# Altium PCB FCM_Integrated.PcbDoc (part 1 of 3)
Units mil, origin at the board's own origin, x right, y up, seen from the top; angles counter-clockwise.
Board outline 5445 x 4366 mil, 4 copper layers (Top Layer, Power, Ground, Bottom Layer), stack 23.756 mil thick; 160 components, 87 nets, 607 pads, 169 vias.
Unrouted connection lines stored in the file: 134.
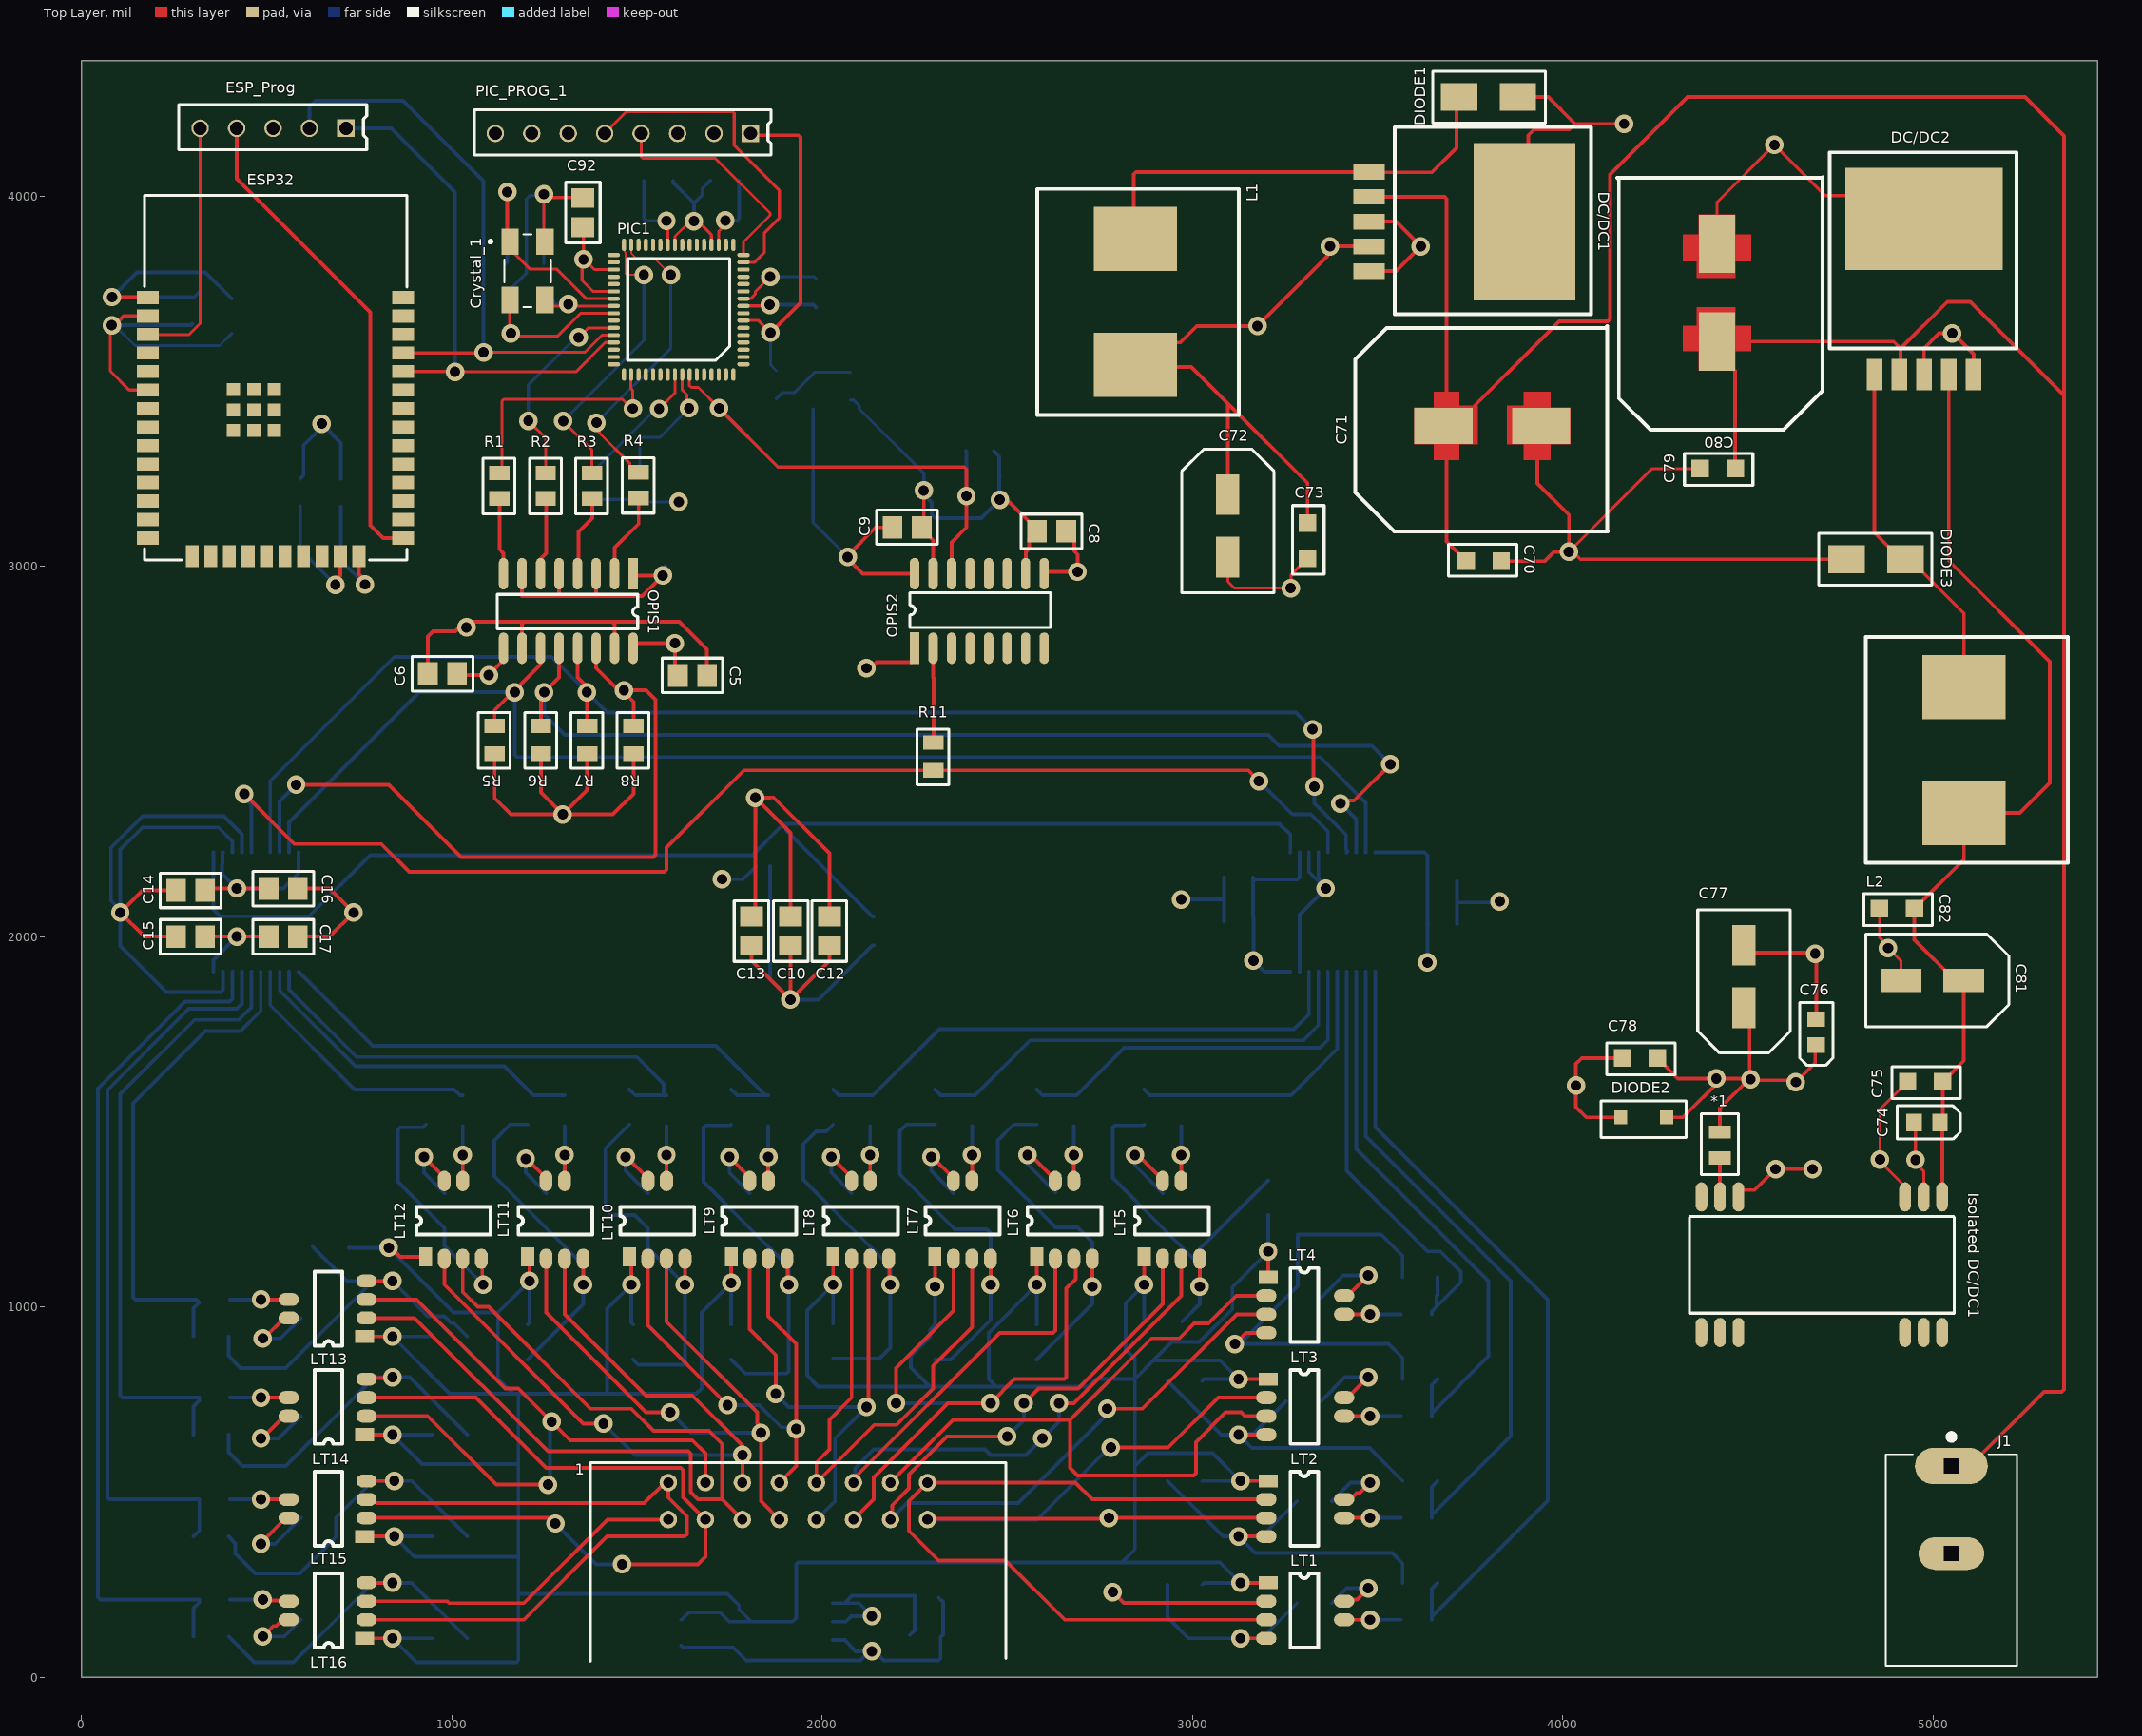
[diagram p0: Top Layer view]
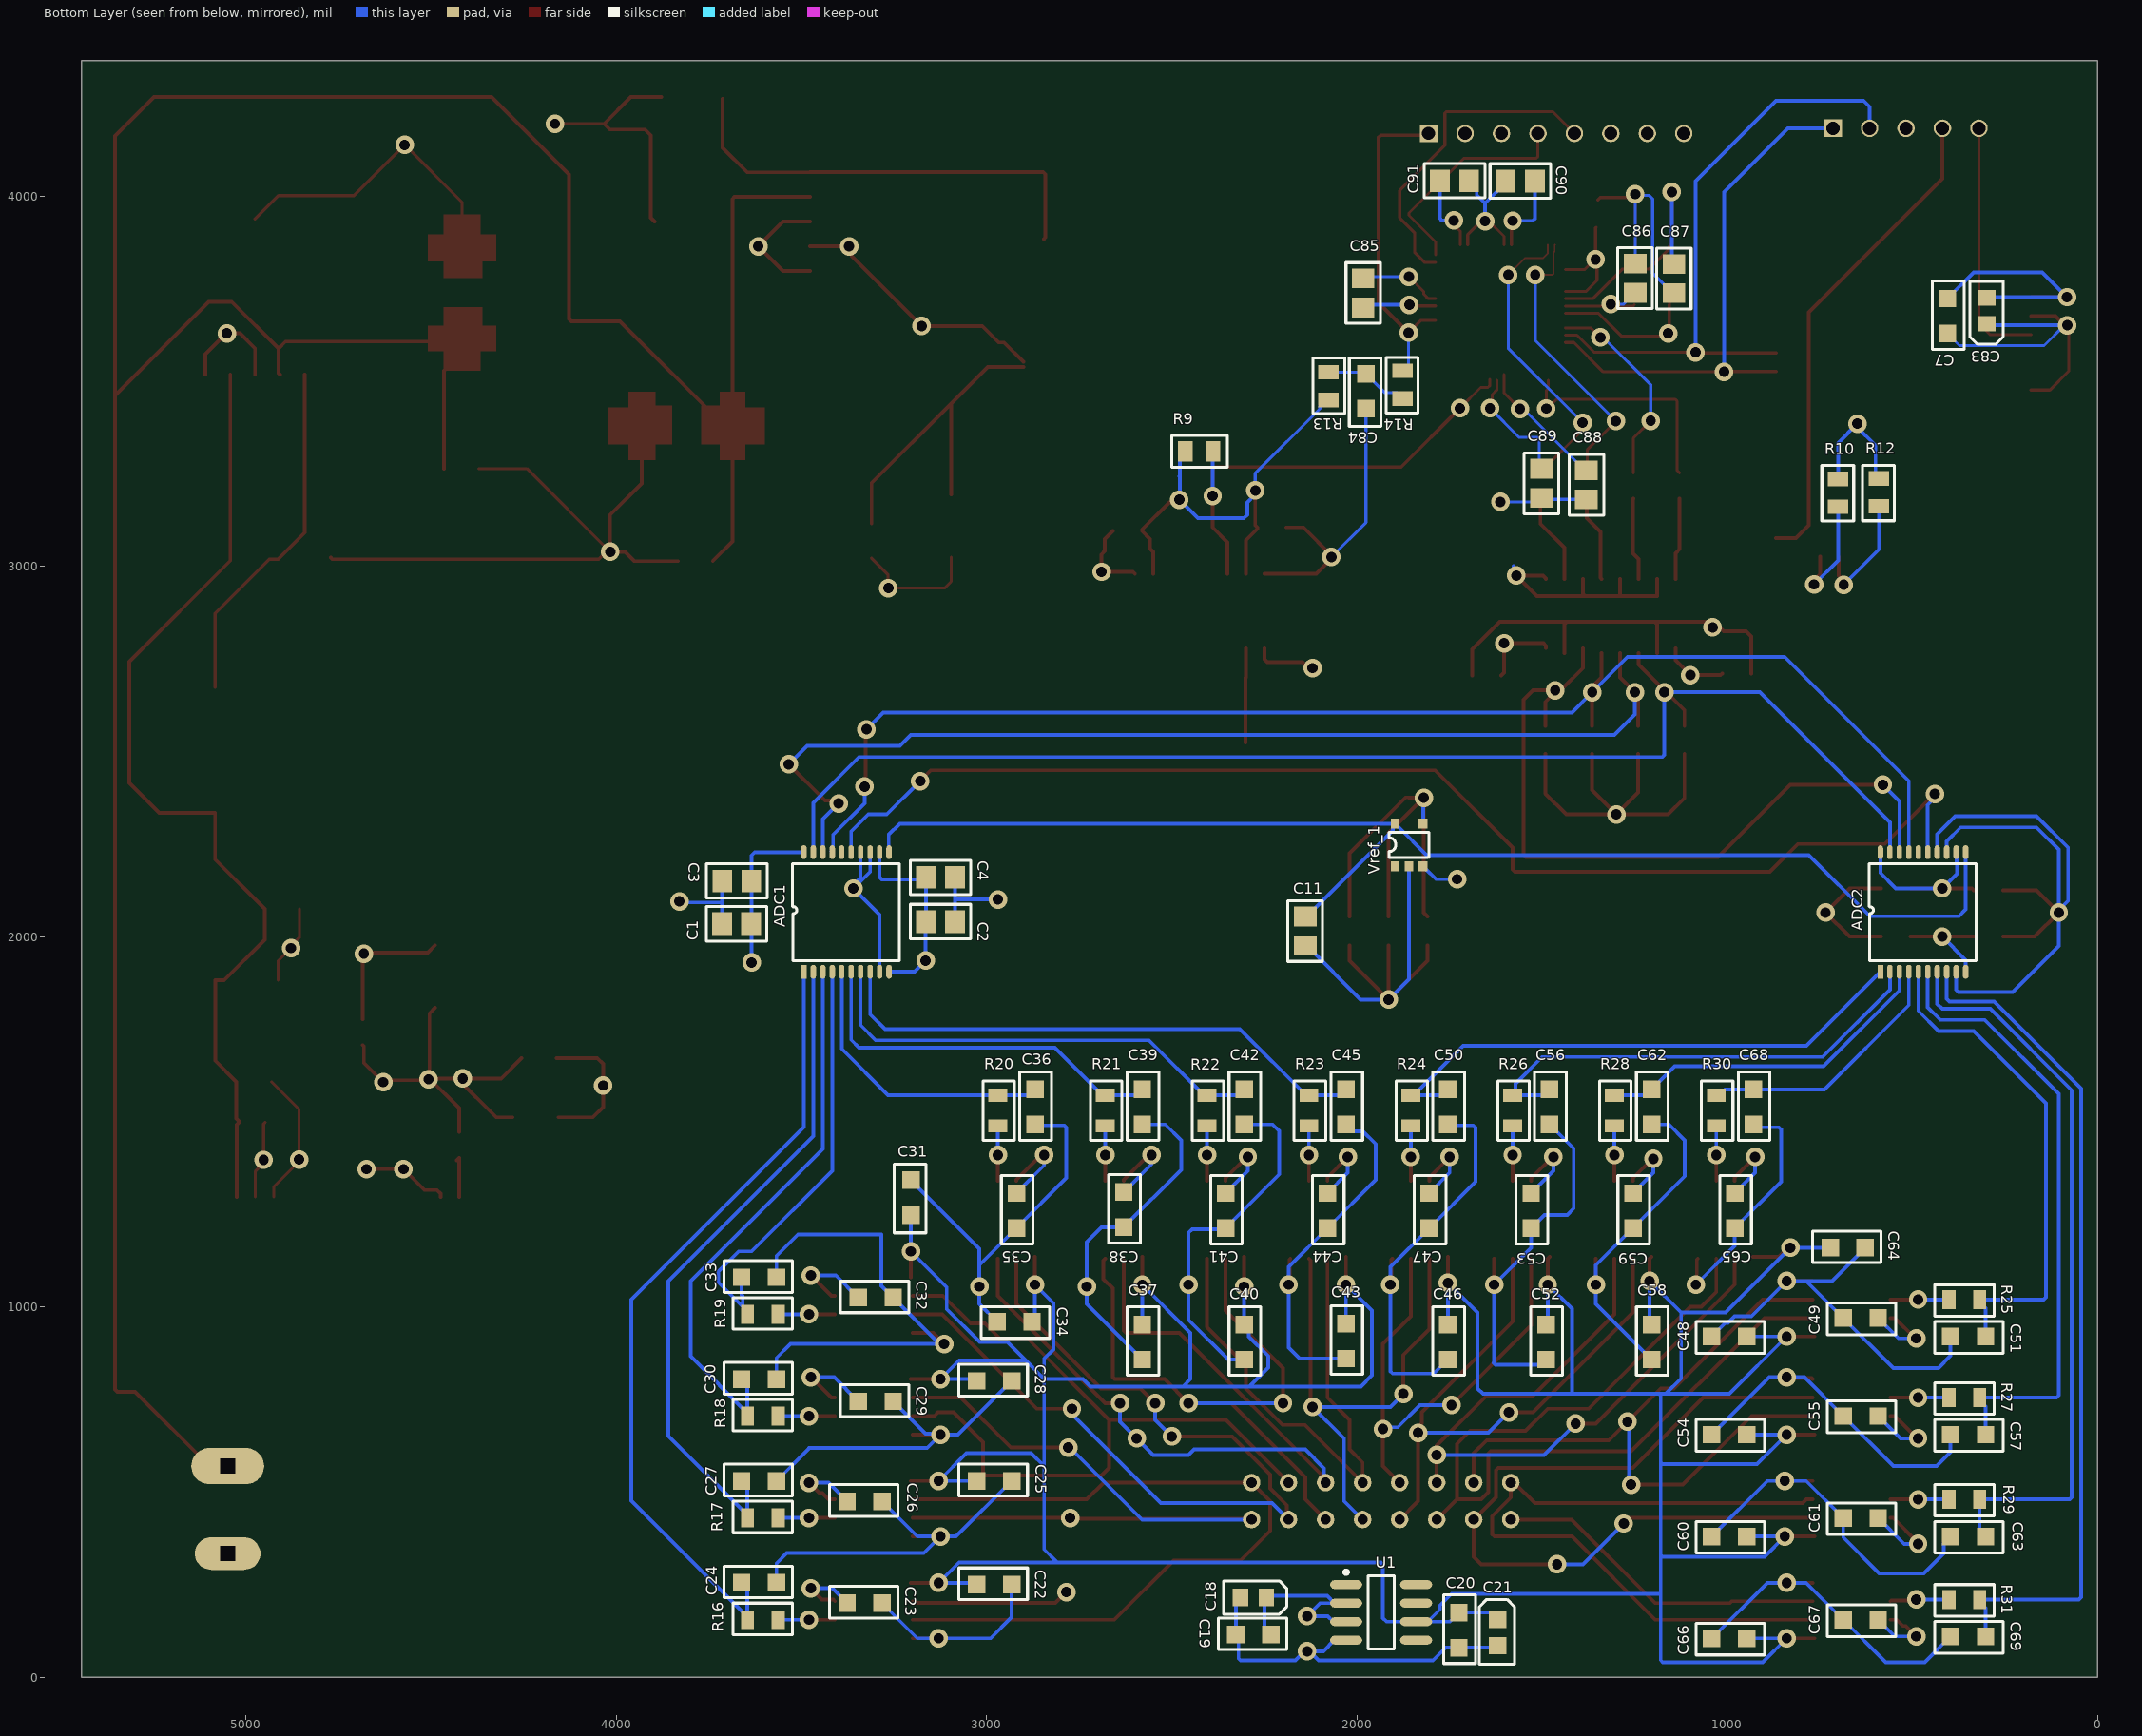
[diagram p1: Bottom Layer view, seen from below]
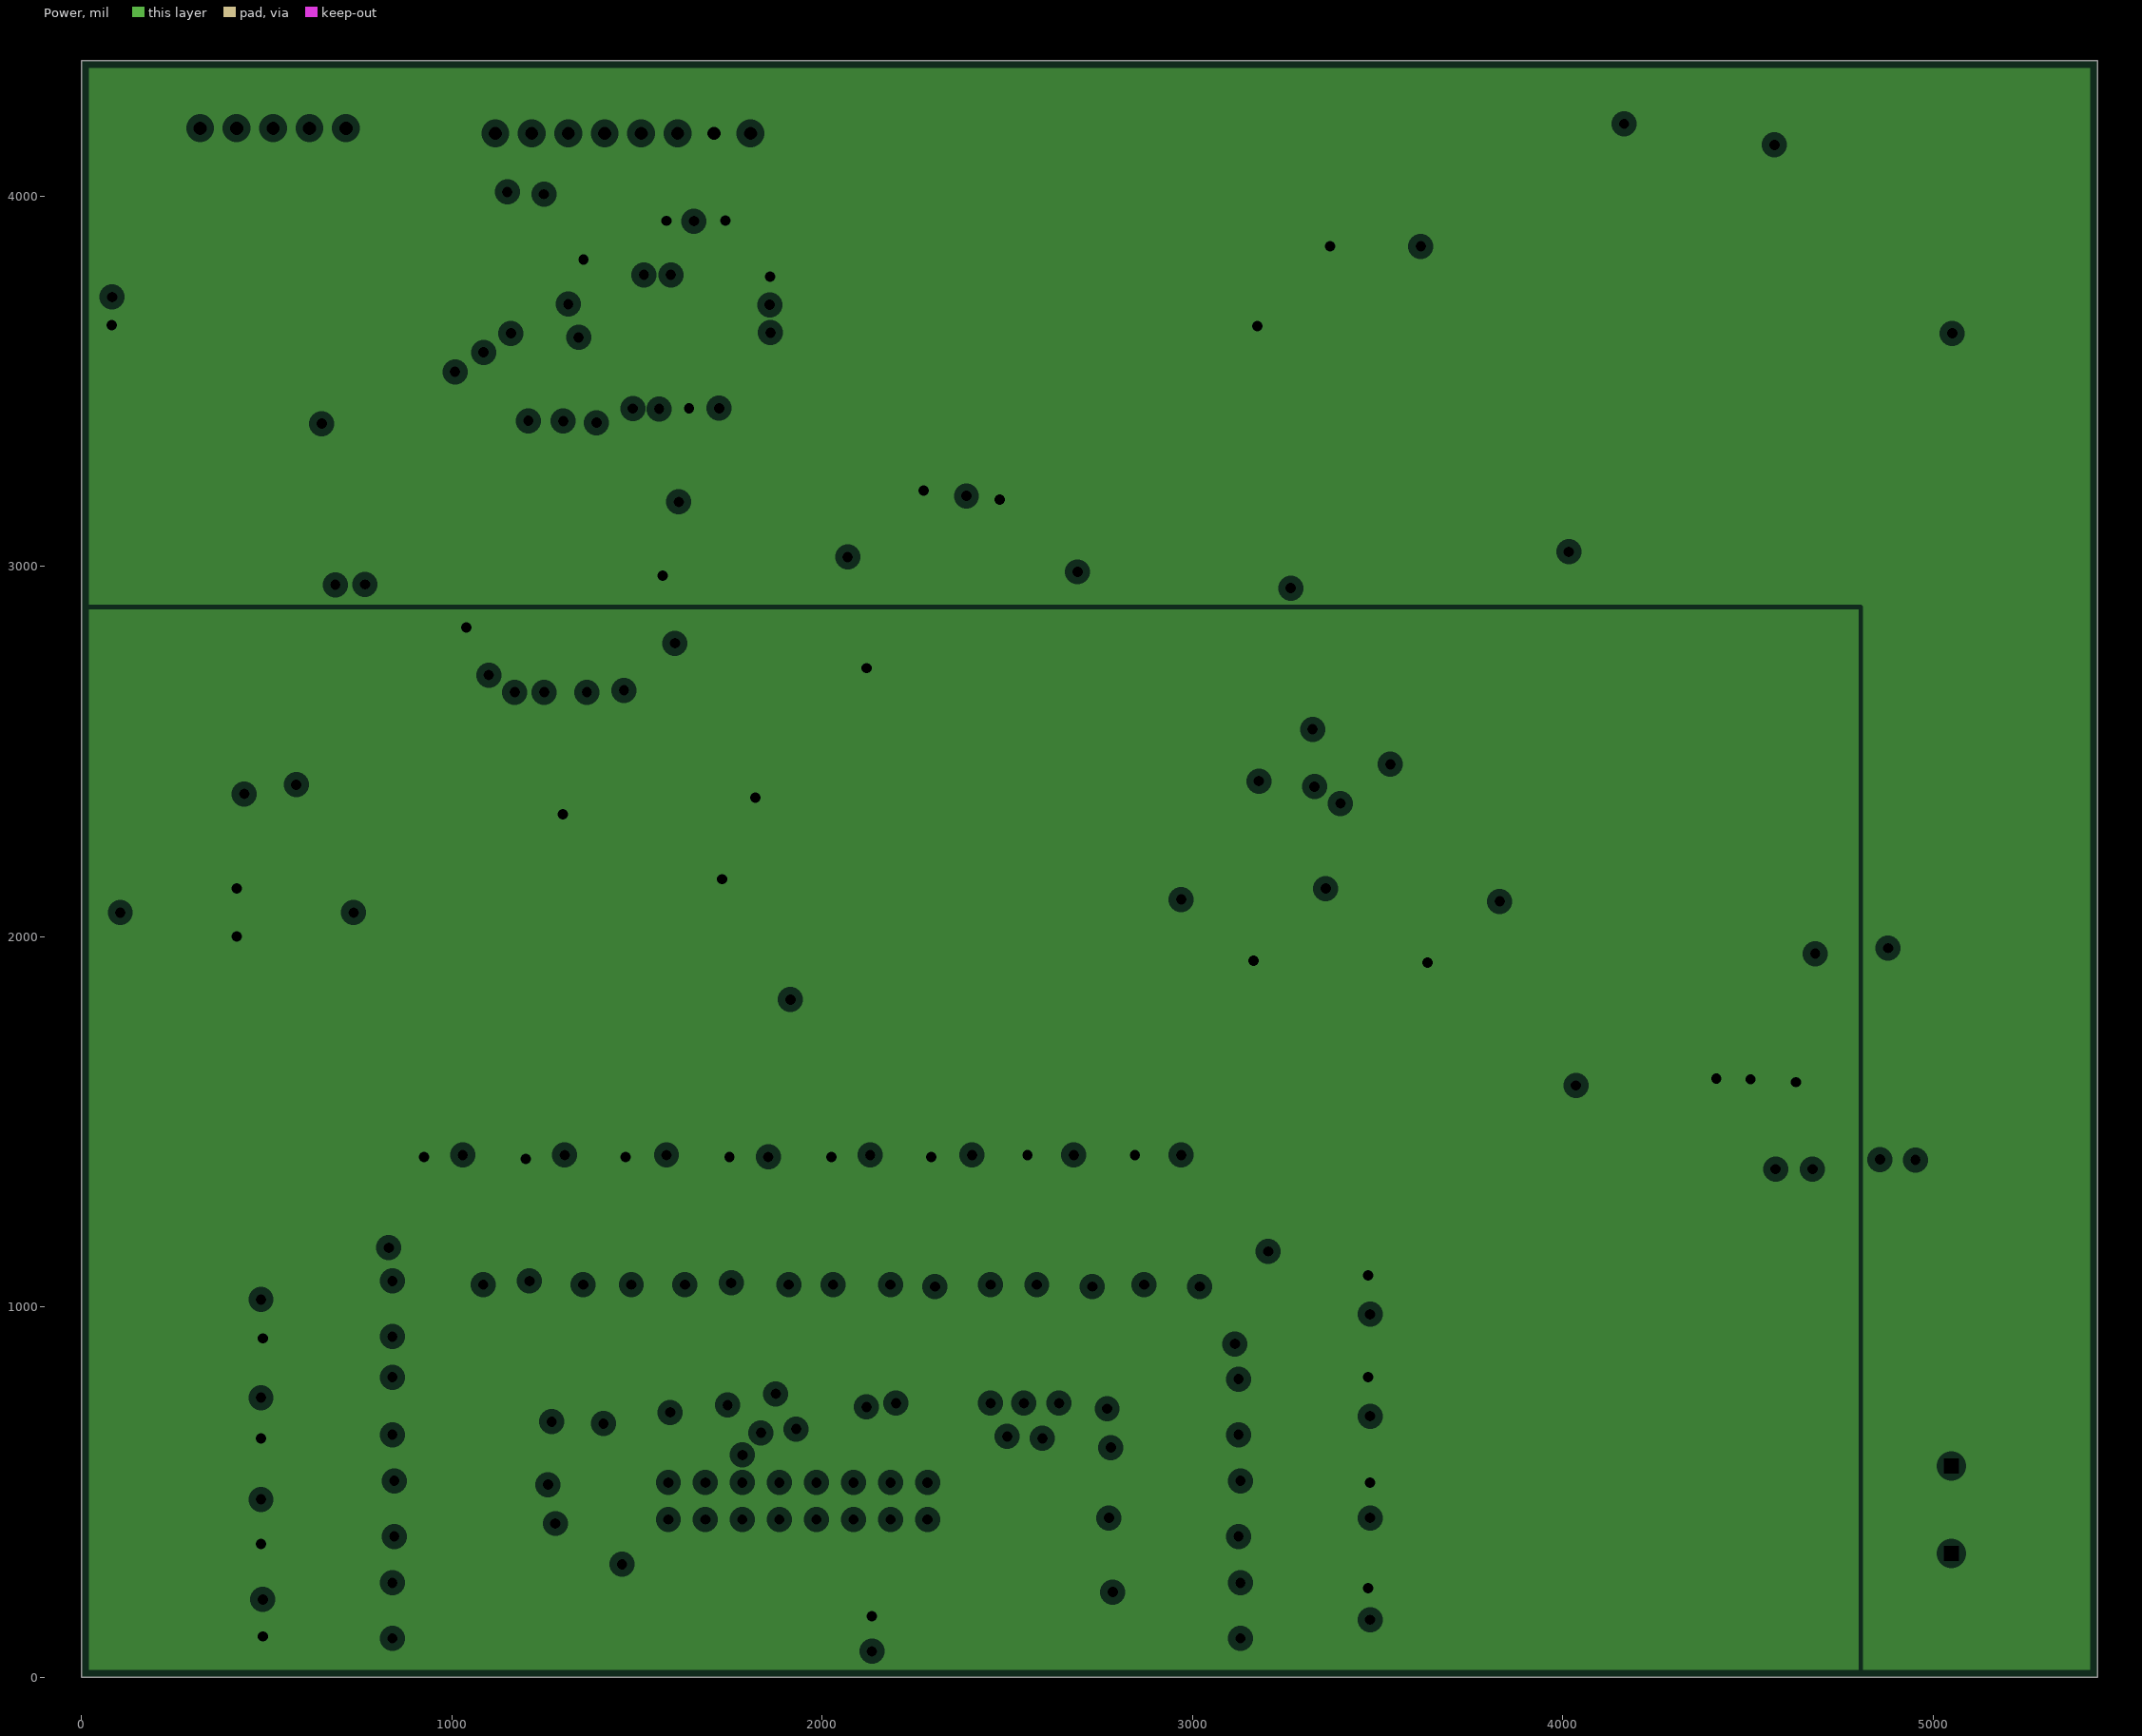
[diagram p2: Power, clearances drawn from the general rule]
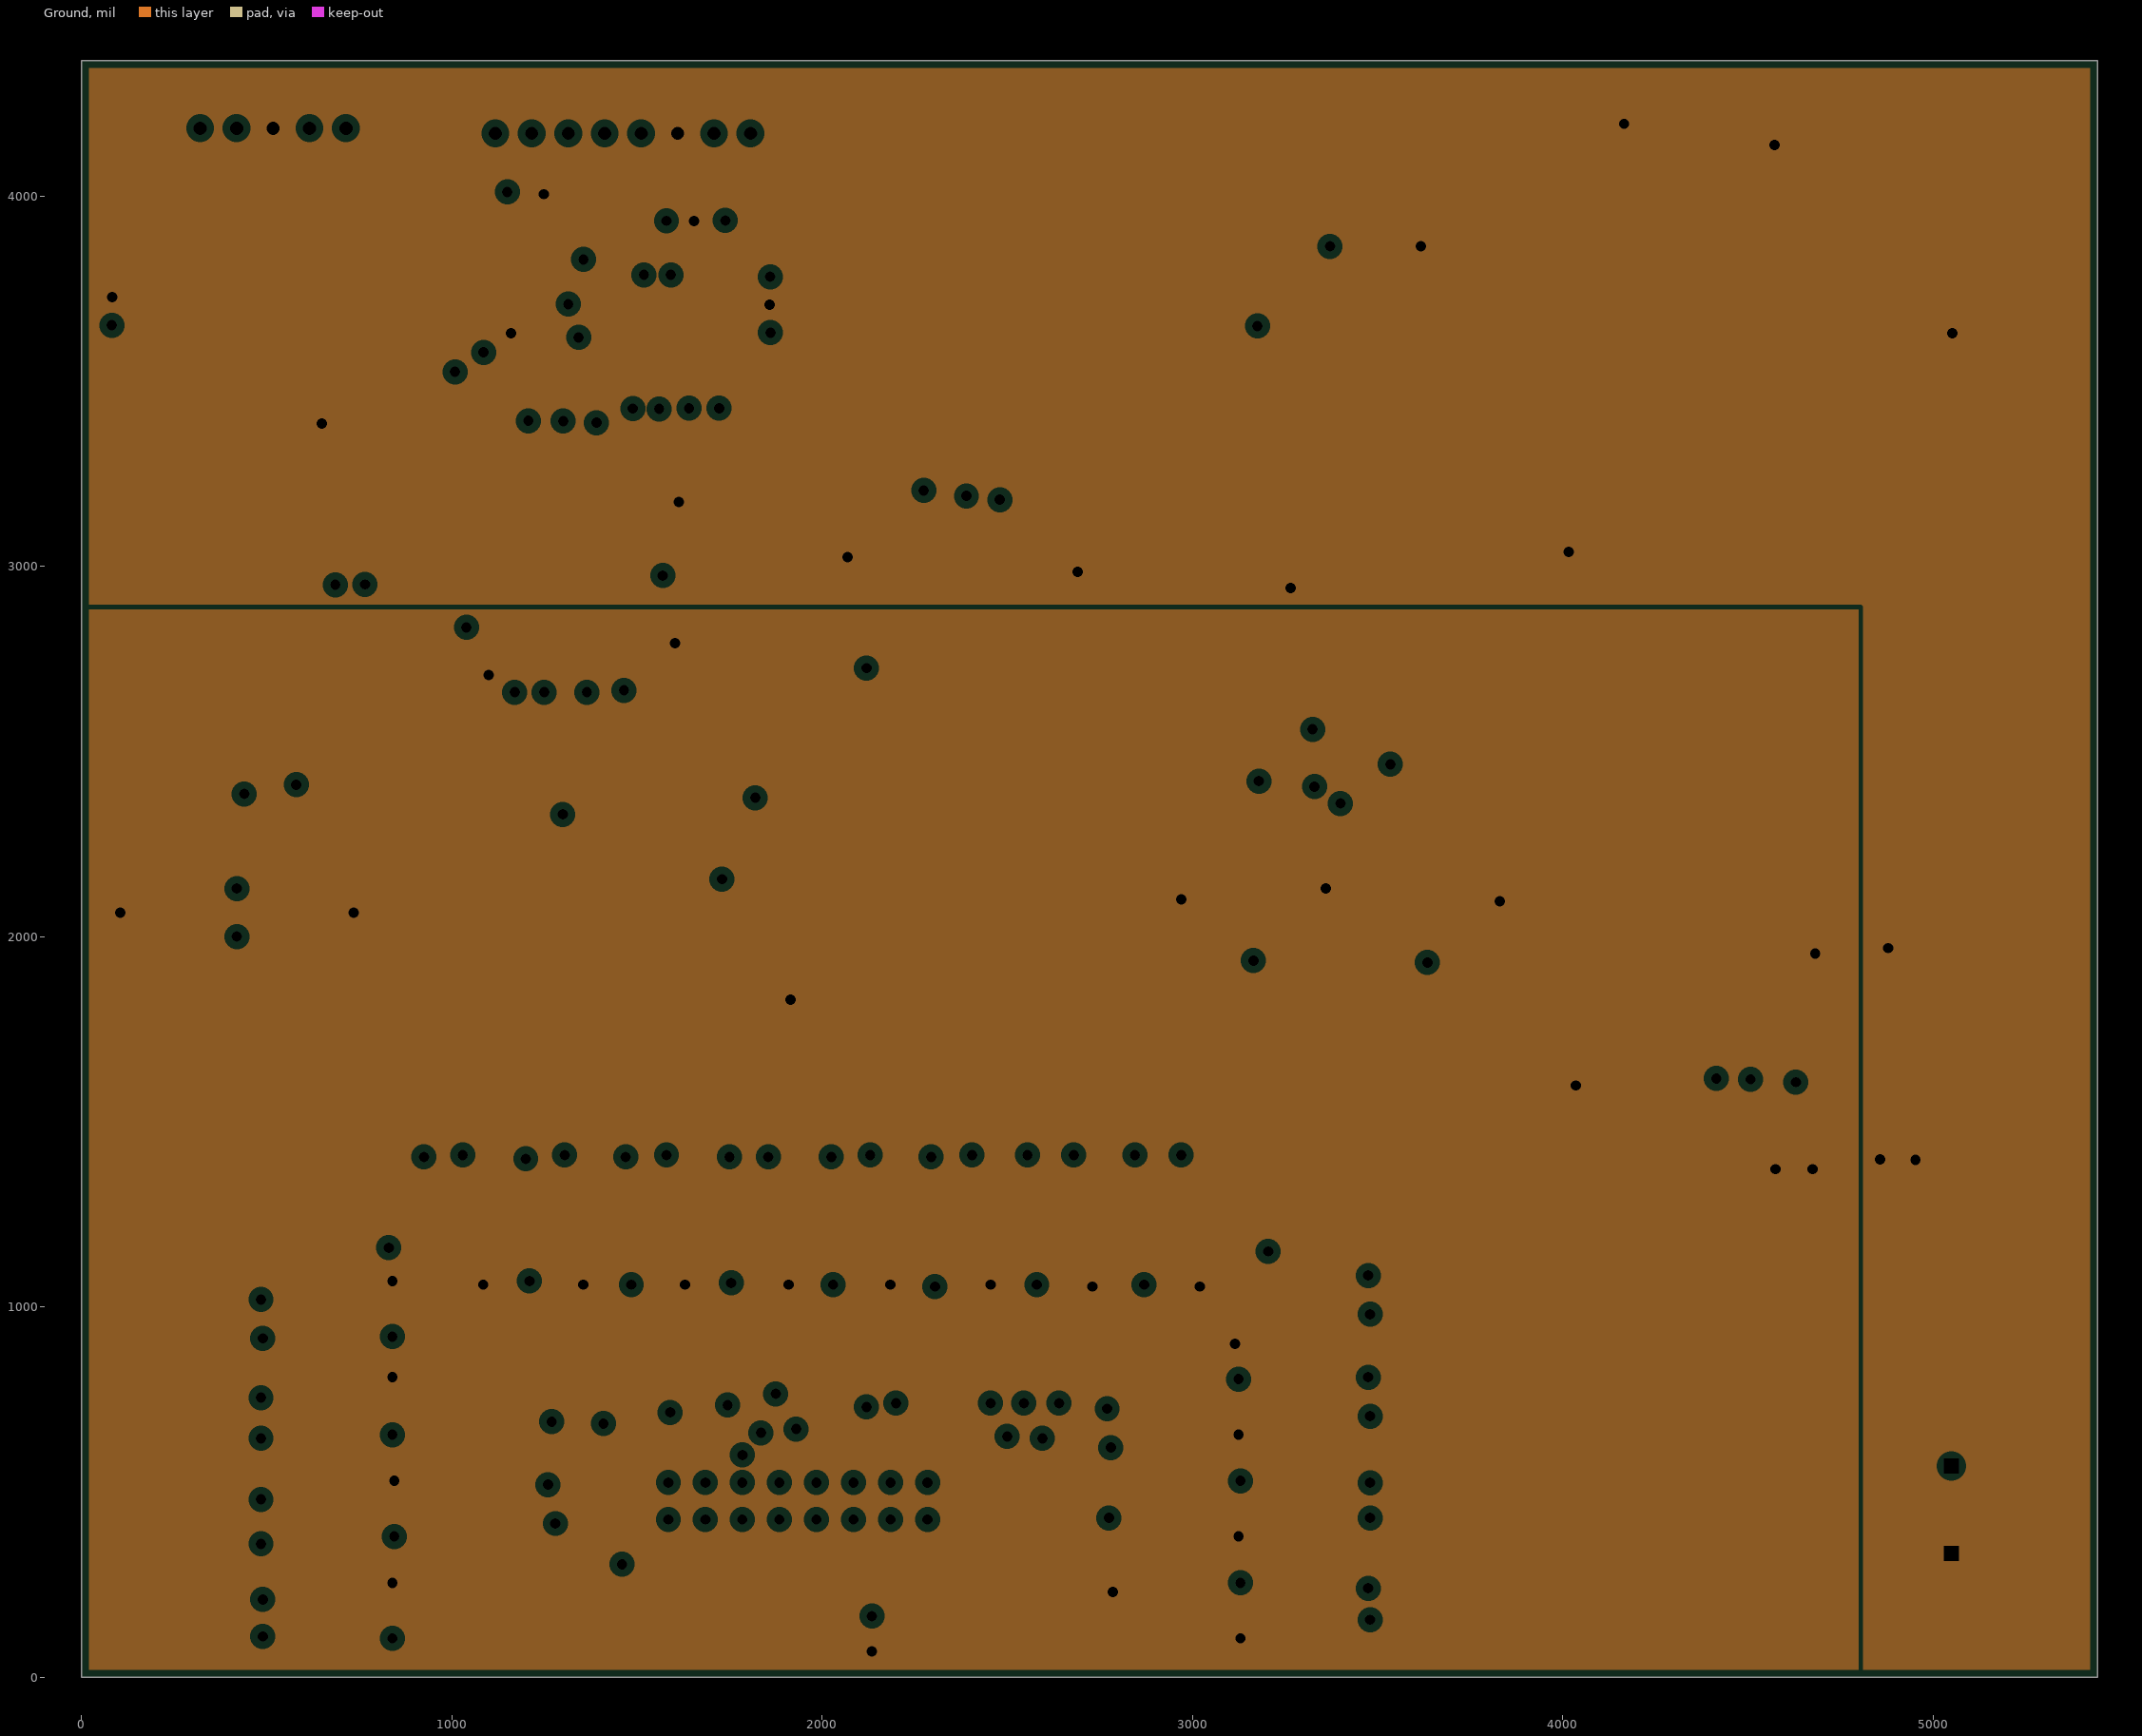
[diagram p3: Ground, clearances drawn from the general rule]
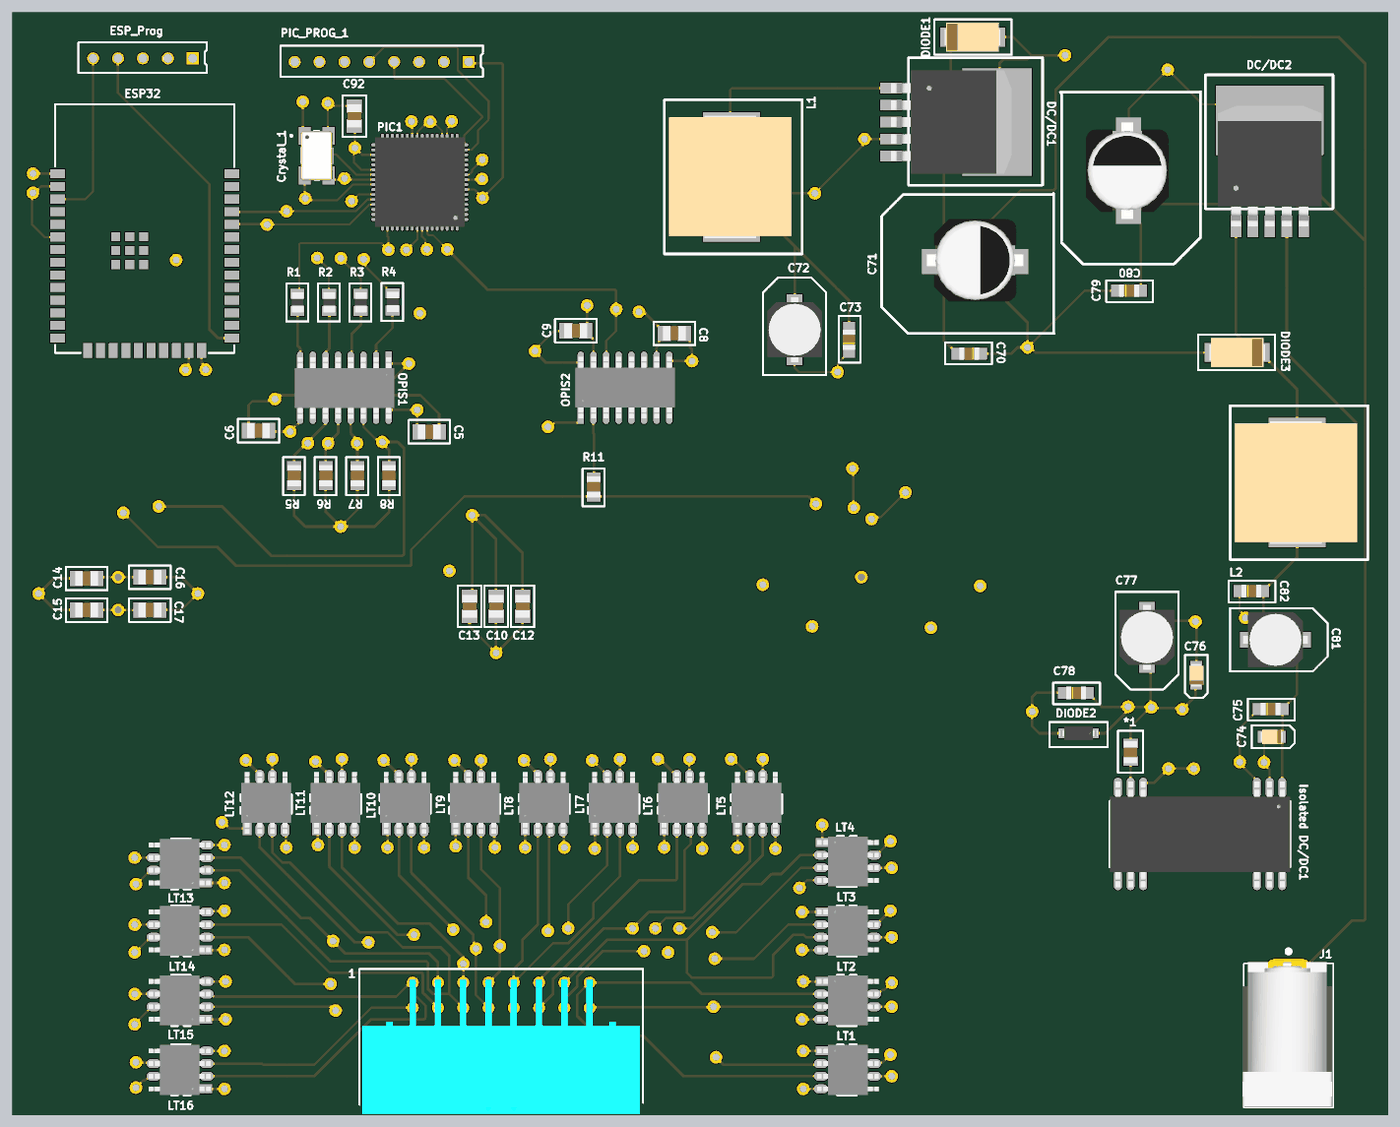
[diagram p5: 3D render of the assembled board from above, using the file's embedded part models]
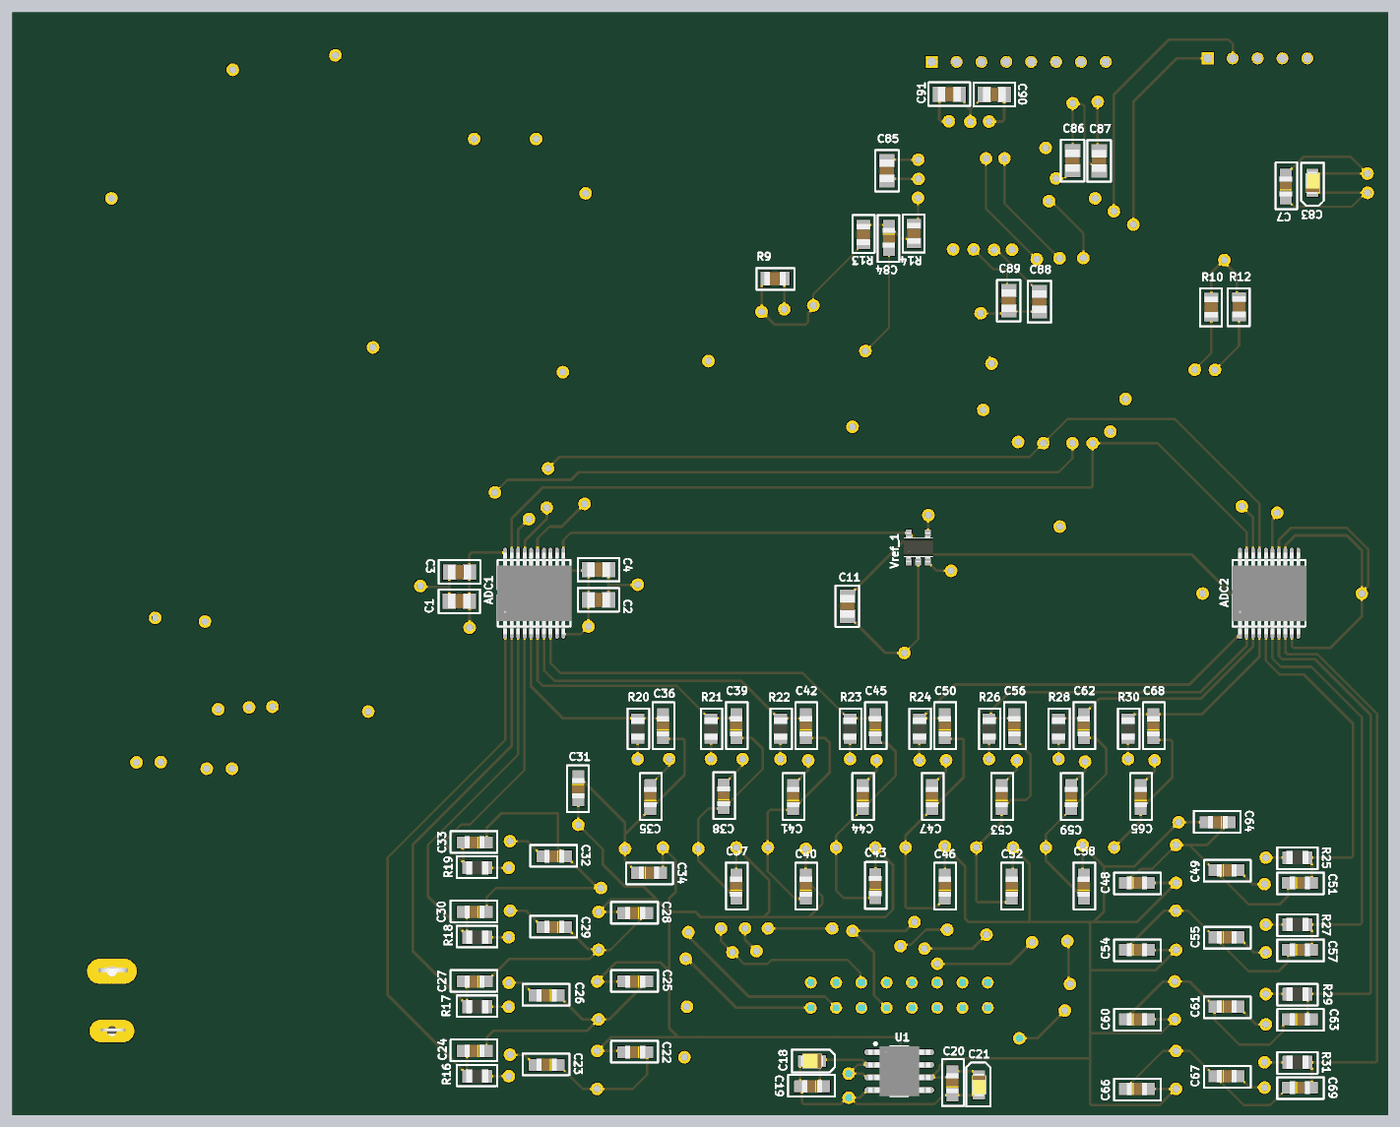
[diagram p6: 3D render of the assembled board from below, using the file's embedded part models]

## Layer stack, top to bottom
Top Solder: solder mask 0.4, Solder Resist, Dk 3.5
Top Layer: signal copper 1.4
Dielectric 2: prepreg 2.8, PP-006, Dk 4.1
Power: plane copper 1.378, net +5
Dielectric 1: dielectric 12.6, FR-4, Dk 4.8
Ground: plane copper 1.378, net GND_H
Dielectric 3: prepreg 2.8, PP-006, Dk 4.1
Bottom Layer: signal copper 1.4
Bottom Solder: solder mask 0.4, Solder Resist, Dk 3.5

## Board outline
0,0 5445,0 5445,4366 0,4366

## Design rules (kind name [scope] priority, off if disabled: settings)
Clearance [All] p1: gap=10 ignorepadtopadclearanceinfootprint=TRUE except(0: Arc-Hole Track-Hole SMDPad-Hole THPad-Hole Via-Hole Fill-Hole Poly-Hole Region-Hole Text-Hole)
HoleSize [All] p1: absolutevalues=TRUE maxlimit=150 minlimit=1 maxpercent=80.000 minpercent=20.000
MinimumSolderMaskSliver [All] p1: minsoldermaskwidth=2
PlaneClearance [All] p1: clearance=20
PlaneConnect [All] p1: planeconnectstyle=Relief reliefexpansion=20 reliefentries=4 reliefconductorwidth=10 reliefairgap=10
PolygonConnect [All] p1: connectstyle=Relief reliefconductorwidth=10 reliefentries=4 polygonreliefangle="90 Angle" airgapwidth=10
RoutingVias [All] p1: holewidth=28 width=50 viastyle="Through Hole" minholewidth=28 minwidth=50 maxholewidth=28 maxwidth=50
SilkToSilkClearance [All] p1: silktosilkclearance=5
SilkToSolderMaskClearance [IsPad] p1: minsilkscreentomaskgap=5 clearancetoexposedcopper=TRUE
SolderMaskExpansion [All] p1: expansion=4 istentingtop=FALSE
Width [All] p1: maxlimit=10 minlimit=5 preferedwidth=8
24 further rules are at their usual default settings.

## Classes and differential pairs
component class PIC32: C84 C85 C86 C87 C88 C89 C90 C91 C92 Crystal_1 PIC1 PIC_PROG_1 R13 R14
component class ESP32: C7 C83 ESP32 ESP_Prog R10 R12
component class Designator: C22 C23 C24 C25 C26 C27 C28 C29 C30 C31 C32 C33 C34 C35 C36 C37 C38 C39 C40 C41 C42 C43 C44 C45 C46 C47 C48 C49 C50 C51 C52 C53 C54 C55 C56 C57 C58 C59 C60 C61 C62 C63 C64 C65 C66 C67 C68 C69 LT1 LT2 LT3 LT4 LT5 LT6 LT7 LT8 LT9 LT10 LT11 LT12 LT13 LT14 LT15 LT16 R16 R17 R18 R19 R20 R21 R22 R23 R24 R25 R26 R27 R28 R29 R30 R31
component class V_Ref_1: C10 C11 C12 C13 Vref_1
component class Opt_Isolator_2: C8 C9 OPIS2 R9 R11
component class Opt_Isolator_1: C5 C6 OPIS1 R1 R2 R3 R4 R5 R6 R7 R8
component class "ISO DC/DC_1": *1 C74 C75 C76 C77 C78 DIODE2 "Isolated DC/DC1"
component class "Fuel Cell Schematic": 1 J1
component class V_Ref_2: C18 C19 C20 C21 U1
component class DC/DC_5_1: C79 C80 C82 DC/DC2 DIODE3 L2
component class DC/DC_3.3_1: C70 C71 C72 C73 DC/DC1 DIODE1 L1
component class ADC1: ADC2 C14 C15 C16 C17

## Components (designator, comment, footprint, x,y, rotation, side; value= is the part's Value field where it differs from the comment)
1 "=Value" ? 1585,525.67 r0 top
*1 "5.1ohm resistor" "5.1 ohm resistor" 4425,1437 r270 top
ADC1 "ADS8344N/1K" ADS8344 3494.13,1905 r90 bottom
ADC2 "ADS8344N/1K" ADS8344 586.77,1905 r90 bottom
C1 "Value" Capacitor_Kemet_0805 3675.63,2035 r0 bottom
C2 "Value" Capacitor_Kemet_0805 3125,2040 r180 bottom
C3 "Value" Capacitor_Kemet_0805 3675,2150 r180 bottom
C4 "Value" Capacitor_Kemet_0805 3125,2160 r0 bottom
C5 "Value" Capacitor_Kemet_0805 1650,2705 r0 top
C6 "Value" Capacitor_Kemet_0805 975,2710 r180 top
C7 ".1 uF (50 V)" ".1uF capacitor" 406,3676 r90 bottom
C8 "Value" Capacitor_Kemet_0805 2620,3095 r180 top
C9 "Value" Capacitor_Kemet_0805 2230,3105 r0 top
C10 "Value" Capacitor_Kemet_0805 1915,2015 r270 top
C11 "Value" Capacitor_Kemet_0805 2140,2015 r90 bottom
C12 "Value" Capacitor_Kemet_0805 2020,2015 r90 top
C13 "Value" Capacitor_Kemet_0805 1810,2015 r90 top
C14 "Value" Capacitor_Kemet_0805 295,2125 r180 top
C15 "Value" Capacitor_Kemet_0805 295,2000 r180 top
C16 "Value" Capacitor_Kemet_0805 545,2130 r180 top
C17 "Value" Capacitor_Kemet_0805 545,2000 r180 top
C18 "10 uF (6.3 V)" "10 uF cap" 2280,215 r180 bottom
C19 ".1 uF (50 V)" ".1uF capacitor" 2280,115 r0 bottom
C20 ".1 uF (50 V)" ".1uF capacitor" 1725,127 r90 bottom
C21 "1uf (10V)" "1 uF cap" 1620,120 r90 bottom
C22 ".1 uF (50 V)" ".1uF capacitor" 2980,250 r0 bottom
C23 ".1 uF (50 V)" ".1uF capacitor" 3330,200 r0 bottom
C24 ".1 uF (50 V)" ".1uF capacitor" 3615,255 r0 bottom
C25 ".1 uF (50 V)" ".1uF capacitor" 2980,530 r0 bottom
C26 ".1 uF (50 V)" ".1uF capacitor" 3330,475 r0 bottom
C27 ".1 uF (50 V)" ".1uF capacitor" 3615,530 r0 bottom
C28 ".1 uF (50 V)" ".1uF capacitor" 2980,800 r0 bottom
C29 ".1 uF (50 V)" ".1uF capacitor" 3300,745 r0 bottom
C30 ".1 uF (50 V)" ".1uF capacitor" 3615,805 r0 bottom
C31 ".1 uF (50 V)" ".1uF capacitor" 3205,1295 r270 bottom
C32 ".1 uF (50 V)" ".1uF capacitor" 3300,1025 r0 bottom
C33 ".1 uF (50 V)" ".1uF capacitor" 3615,1080 r0 bottom
C34 ".1 uF (50 V)" ".1uF capacitor" 2925,960 r180 bottom
C35 ".1 uF (50 V)" ".1uF capacitor" 2920,1260 r90 bottom
C36 ".1 uF (50 V)" ".1uF capacitor" 2870,1540 r90 bottom
C37 ".1 uF (50 V)" ".1uF capacitor" 2580,905 r90 bottom
C38 ".1 uF (50 V)" ".1uF capacitor" 2630,1262.76 r90 bottom
C39 ".1 uF (50 V)" ".1uF capacitor" 2580,1540 r90 bottom
C40 ".1 uF (50 V)" ".1uF capacitor" 2305,905 r90 bottom
C41 ".1 uF (50 V)" ".1uF capacitor" 2355,1260 r90 bottom
C42 ".1 uF (50 V)" ".1uF capacitor" 2305,1540 r90 bottom
C43 ".1 uF (50 V)" ".1uF capacitor" 2030,907.76 r90 bottom
C44 ".1 uF (50 V)" ".1uF capacitor" 2080,1260 r90 bottom
C45 ".1 uF (50 V)" ".1uF capacitor" 2030,1540 r90 bottom
C46 ".1 uF (50 V)" ".1uF capacitor" 1755,905 r90 bottom
C47 ".1 uF (50 V)" ".1uF capacitor" 1805,1260 r90 bottom
C48 ".1 uF (50 V)" ".1uF capacitor" 995,920 r180 bottom
C49 ".1 uF (50 V)" ".1uF capacitor" 640,970 r180 bottom
C50 ".1 uF (50 V)" ".1uF capacitor" 1755,1540 r90 bottom
C51 ".1 uF (50 V)" ".1uF capacitor" 350,920 r180 bottom
C52 ".1 uF (50 V)" ".1uF capacitor" 1490,905 r90 bottom
C53 ".1 uF (50 V)" ".1uF capacitor" 1530,1260 r90 bottom
C54 ".1 uF (50 V)" ".1uF capacitor" 995,655 r180 bottom
C55 ".1 uF (50 V)" ".1uF capacitor" 640,705 r180 bottom
C56 ".1 uF (50 V)" ".1uF capacitor" 1480,1540 r90 bottom
C57 ".1 uF (50 V)" ".1uF capacitor" 350,655 r180 bottom
C58 ".1 uF (50 V)" ".1uF capacitor" 1205,905 r90 bottom
C59 ".1 uF (50 V)" ".1uF capacitor" 1255,1260 r90 bottom
C60 ".1 uF (50 V)" ".1uF capacitor" 995,380 r180 bottom
C61 ".1 uF (50 V)" ".1uF capacitor" 640,430 r180 bottom
C62 ".1 uF (50 V)" ".1uF capacitor" 1205,1540 r90 bottom
C63 ".1 uF (50 V)" ".1uF capacitor" 350,380 r180 bottom
C64 ".1 uF (50 V)" ".1uF capacitor" 675,1160 r0 bottom
C65 ".1 uF (50 V)" ".1uF capacitor" 980,1260 r90 bottom
C66 ".1 uF (50 V)" ".1uF capacitor" 995,105 r180 bottom
C67 ".1 uF (50 V)" ".1uF capacitor" 640,155 r180 bottom
C68 ".1 uF (50 V)" ".1uF capacitor" 930,1540 r90 bottom
C69 ".1 uF (50 V)" ".1uF capacitor" 350,110 r180 bottom
C70 ".1 uF (50 V)" ".1uF capacitor" 3787,3014 r180 top
C71 "330 uF (35 V)" "330uf cap" 3810.11,3379 r0 top
C72 "220 uF (6.3 V)" "220 uf cap" 3096,3109 r90 top
C73 ".1 uF (50 V)" ".1uF capacitor" 3311,3069 r90 top
C74 "10 uF (6.3 V)" "10 uF cap" 4984.06,1498 r0 top
C75 ".1 uF (50 V)" ".1uF capacitor" 4979.06,1608 r0 top
C76 "10 uF (6.3 V)" "10 uF cap" 4685,1742 r270 top
C77 "220 uF (6.3 V)" "220 uf cap" 4490,1892 r270 top
C78 ".1 uF (50 V)" ".1uF capacitor" 4208.94,1672 r0 top
C79 ".1 uF (50 V)" ".1uF capacitor" 4419,3264 r0 top
C80 "330 uF (35 V)" "330uf cap" 4417,3738.89 r90 top
C81 "220 uF (6.3 V)" "220 uf cap" 4998.35,1882 r0 top
C82 ".1 uF (50 V)" ".1uF capacitor" 4903,2075 r0 top
C83 "10 uF (6.3 V)" "10 uF cap" 300,3690 r270 bottom
C84 ".1 uF (50 V)" ".1uF capacitor" 1976,3472.76 r270 bottom
C85 "Value" Capacitor_Kemet_0805 1984,3738 r270 bottom
C86 "Value" Kemet_10pF_0805 1250,3778 r90 bottom
C87 "Value" Kemet_10pF_0805 1145,3777 r90 bottom
C88 "Value" Capacitor_Kemet_0805 1381,3220 r270 bottom
C89 "Value" Capacitor_Kemet_0805 1502,3224 r90 bottom
C90 "Value" Capacitor_Kemet_0805 1559,4040 r180 bottom
C91 "Value" Capacitor_Kemet_0805 1737,4041 r180 bottom
C92 "Value" Capacitor_Kemet_0805 1354,3955 r270 top
Crystal_1 "405C11A16M00000" XTAL_405C11A16M00000 1205,3798 r0 top
DC/DC1 "Value" LM2595s-3.3 3477,3930.93 r0 top
DC/DC2 "LM2595s-5.0" LM2595s-5.0 4976,3517.92 r90 top
DIODE1 "B340AE-13" B340AE-13 3799,4267 r180 top
DIODE2 "Value" "MMSZ5231B-7-F Zener diode" 4218.94,1512 r0 top
DIODE3 "B340AE-13" B340AE-13 4847,3019 r0 top
ESP32 "ESP32-WROOM-32D(" ESP32 180.02,3726 r0 top
ESP_Prog "PIC_ESP_Program" ESP_Program 714.43,4183 r180 top
"Isolated DC/DC1" "DCP020505U/1K" DCP020505U 5025,1297 r270 top
J1 "PJ-037A" CUI_PJ-037A 5050,570.22 r270 top
L1 "100 uH" "100uH inductor" 2846,3884 r270 top
L2 "100 uH" "100uH inductor" 5084,2674 r270 top
LT1 "LT1990" LT1990ACS8 3205,255 r0 top
LT2 "LT1990" LT1990ACS8 3205,530 r0 top
LT3 "LT1990" LT1990ACS8 3205,805 r0 top
LT4 "LT1990" LT1990ACS8 3205,1080 r0 top
LT5 "LT1990" LT1990ACS8 2870,1135 r90 top
LT6 "LT1990" LT1990ACS8 2580,1135 r90 top
LT7 "LT1990" LT1990ACS8 2305,1135 r90 top
LT8 "LT1990" LT1990ACS8 2030,1135 r90 top
LT9 "LT1990" LT1990ACS8 1755,1135 r90 top
LT10 "LT1990" LT1990ACS8 1480,1135 r90 top
LT11 "LT1990" LT1990ACS8 1205,1135 r90 top
LT12 "LT1990" LT1990ACS8 930,1135 r90 top
LT13 "LT1990" LT1990ACS8 765,920 r180 top
LT14 "LT1990" LT1990ACS8 765,655 r180 top
LT15 "LT1990" LT1990ACS8 765,380 r180 top
LT16 "LT1990" LT1990ACS8 765,105 r180 top
OPIS1 "Value" Opto_Isolator_ACSL6400_50TE 1490,2980 r270 top
OPIS2 "Value" Opto_Isolator_ACSL6400_50TE 2250,2778.82 r90 top
PIC1 "PIC32MX470F512H-" Quad64_2 1788,3545.52 r180 top
PIC_PROG_1 "PIC_Program_Module" PIC_32_POD 1465.32,4168.02 r180 top
R1 "Value" LowR_Yageo 1125,3240 r90 top
R2 "Value" LowR_Yageo 1250,3240 r90 top
R3 "Value" LowR_Yageo 1375,3240 r90 top
R4 "Value" LowR_Yageo 1501.06,3242.09 r90 top
R5 "Value" Resistor_YAGEO_0805 1115,2530 r90 top
R6 "Value" Resistor_YAGEO_0805 1240,2530 r90 top
R7 "Value" Resistor_YAGEO_0805 1365,2530 r90 top
R8 "Value" Resistor_YAGEO_0805 1490,2530 r90 top
R9 "Value" Resistor_YAGEO_0805 2425,3310 r0 bottom
R10 "Value" Resistor_YAGEO_0805 702,3197 r90 bottom
R11 "Value" Resistor_YAGEO_0805 2300,2485 r90 top
R12 "Value" Resistor_YAGEO_0805 592,3198 r90 bottom
R13 "Value" Resistor_YAGEO_0805 2076,3488 r270 bottom
R14 "Value" Resistor_YAGEO_0805 1878,3489 r90 bottom
R16 "1kohm resistor" "1kohm resistor" 3605,155 r0 bottom
R17 "1kohm resistor" "1kohm resistor" 3605,430 r0 bottom
R18 "1kohm resistor" "1kohm resistor" 3605,705 r0 bottom
R19 "1kohm resistor" "1kohm resistor" 3605,980 r0 bottom
R20 "1kohm resistor" "1kohm resistor" 2970,1530 r90 bottom
R21 "1kohm resistor" "1kohm resistor" 2680,1530 r90 bottom
R22 "1kohm resistor" "1kohm resistor" 2405,1530 r90 bottom
R23 "1kohm resistor" "1kohm resistor" 2130,1530 r90 bottom
R24 "1kohm resistor" "1kohm resistor" 1855,1530 r90 bottom
R25 "1kohm resistor" "1kohm resistor" 360,1020 r180 bottom
R26 "1kohm resistor" "1kohm resistor" 1580,1530 r90 bottom
R27 "1kohm resistor" "1kohm resistor" 360,755 r180 bottom
R28 "1kohm resistor" "1kohm resistor" 1305,1530 r90 bottom
R29 "1kohm resistor" "1kohm resistor" 360,480 r180 bottom
R30 "1kohm resistor" "1kohm resistor" 1030,1530 r90 bottom
R31 "1kohm resistor" "1kohm resistor" 360,210 r180 bottom
U1 "REF191GSZ-REEL" ADI-R-8_N 1935,175 r180 bottom
Vref_1 "Value" VRef 1898,2195 r90 bottom

## Footprints (in the part's own frame and the unit in brackets; to place one, negate y for a bottom-side part, rotate by r counter-clockwise, add the part's x,y. Pads: shape width x height; smd on the part's side, far side on the other; paste and mask are expansions set on the pad)
"1 uF cap" [mm]
  rect 1.15x1.2 smd: 1(0.889,0) 2(-0.889,0)
  silkscreen extent -2.16,-1.14 2.29,1.27, body extent -1.12,-0.72 1.12,0.72, height 1.24
"1kohm resistor" [mm]
  rect 0.9x1.3 smd: 1(-1.05,0) 2(1.05,0)
  silkscreen extent -2.03,-1.14 2.03,1.02, body extent -1.1,-0.67 1.1,0.67, height 0.66
"5.1 ohm resistor" [mm]
  rect 0.9x1.5 smd: 1(-0.889,0) 2(0.889,0)
  silkscreen extent -2.16,-1.27 2.03,1.27, body extent -1.1,-0.67 1.1,0.67, height 0.66
"10 uF cap" [mm]
  rect 1.05x1.2 smd: 1(0.889,0) 2(-0.889,0)
  silkscreen extent -2.03,-1.14 2.29,1.14, body extent -1.12,-0.72 1.12,0.72, height 1.24
"100uH inductor" [mm]
  rect 4.4x5.7 smd: 1(0,0) 2(8.636,0)
  silkscreen extent -3.43,-6.73 12.06,7.11, body extent -1.83,-6.27 10.47,6.02, height 8.05
"220 uf cap" [mm]
  rect 2.8x1.6 smd: 1(2.15,0) 2(-2.15,0)
  silkscreen extent -4.57,-3.18 5.25,3.18, body extent -3.25,-2.76 3.25,2.76, height 6.15
"330uf cap" [mil]
  rect 157x98 smd paste+0 mask+0: 1(-131.89,0) 2(131.89,0)
  Top Layer region: -157.39,49 -210.39,49 -210.39,-49 -157.39,-49 -157.39,-92 -90,-92 -90,-49 -40,-49 -40,55 -90,55 -90,92 -157.39,92
  Top Layer region: 85,55 40,55 40,-49 85,-49 85,-92 157.39,-92 157.39,-49 210.39,-49 210.39,49 157.39,49 157.39,92 85,92
  silkscreen extent -370,-285 312,270, body extent -191,-158 191,168, height 414
".1uF capacitor" [mm]
  rect 1.2x1.2 smd: 1(-1.2,0) 2(1.2,0)
  silkscreen extent -2.29,-1.14 2.41,1.03, body extent -1,-0.63 1,0.63, height 1.35
ADI-R-8_N [mm] "SOIC, 8-Leads, Body 4.9x3.9mm, Pitch 1.27mm, IPC Medium Density"
  oval 2.2x0.6 smd: 1(-2.4,1.905) 2(-2.4,0.635) 3(-2.4,-0.635) 4(-2.4,-1.905) 5(2.4,-1.905) 6(2.4,-0.635) 7(2.4,0.635) 8(2.4,1.905)
  silkscreen extent -2.53,-2.5 0.9,2.88, body extent -3.1,-2.5 3.1,2.5, height 1.76
ADS8344 [mm]
  rect 0.95x0.38 smd: 1(0,0)
  oval 0.95x0.38 smd: 2(0,-0.65) 3(0,-1.3) 4(0,-1.95) 5(0,-2.6) 6(0,-3.25) 7(0,-3.9) 8(0,-4.55) 9(0,-5.2) 10(0,-5.85) 11(8.2,-5.85) 12(8.2,-5.2) 13(8.2,-4.55) 14(8.2,-3.9) 15(8.2,-3.25) 16(8.2,-2.6) 17(8.2,-1.95) 18(8.2,-1.3) 19(8.2,-0.65) 20(8.2,0)
  silkscreen extent 0.75,-6.55 7.42,0.77, body extent -0.03,-6.67 8.18,0.82, height 2.01
B340AE-13 [mm]
  rect 2.5x1.9 smd: A(-2.032,0) K(2,0)
  silkscreen extent -3.94,-1.78 3.81,1.78, body extent -2.79,-1.46 2.79,1.46, height 2.44
Capacitor_Kemet_0805 [mm]
  rect 1.35x1.55 smd: 1(-1,0) 2(1,0)
  silkscreen extent -2.08,-1.17 2.08,1.19, body extent -1.15,-0.72 1.15,0.72, height 1.4
CUI_PJ-037A [mm]
  oval 2.5x5 hole 1 square: 1(0,0)
  oval 2.25x4.5 hole 1 square: 2(6,0)
  silkscreen extent -2.2,-4.5 13.7,4.5, body extent -0.91,-4.63 13.59,4.37, height 10.51
DCP020505U [mm]
  oval 2x0.8 smd: 1(0,0) 2(0,-1.27) 3(0,-2.54) 4(0,-13.97) 5(0,-15.24) 6(0,-16.51) 7(9.3,0) 8(9.3,-1.27) 9(9.3,-2.54) 10(9.3,-13.97) 11(9.3,-15.24) 12(9.3,-16.51)
  silkscreen extent 1.33,-17.35 7.97,0.82, body extent -0.63,-17.3 10.02,0.79, height 1.7
ESP32 [mm]
  rect 1.5x0.9 smd: 1(0,0) 2(0,-6.35) 2(0,-1.27) 3(0,-2.54) 4(0,-3.81) 5(0,-5.08) 7(0,-7.62) 8(0,-8.89) 9(0,-10.16) 10(0,-11.43) 11(0,-12.7) 12(0,-13.97) 13(0,-15.24) 14(0,-16.51) 25(17.5,-16.51) 26(17.5,-15.24) 27(17.5,-13.97) 28(17.5,-12.7) 29(17.5,-11.43) 30(17.5,-10.16) 31(17.5,-8.89) 32(17.5,-7.62) 33(17.5,-6.35) 34(17.5,-5.08) 35(17.5,-3.81) 36(17.5,-2.54) 37(17.5,-1.27) 38(17.5,0)
  rect 0.9x1.5 smd: 15(3.035,-17.76) 16(4.31,-17.76) 17(5.58,-17.76) 18(6.86,-17.76) 19(8.12,-17.76) 20(9.39,-17.76) 21(10.66,-17.76) 22(11.93,-17.76) 23(13.2,-17.76) 24(14.47,-17.76)
  rect 0.9x0.9 smd: 39(5.85,-9.12) 39(5.85,-7.72) 39(5.85,-6.32) 39(7.25,-9.12) 39(7.25,-7.72) 39(7.25,-6.32) 39(8.65,-9.12) 39(8.65,-7.72) 39(8.65,-6.32)
  silkscreen extent -0.25,-18 17.75,7
ESP_Program [mm]
  rect 1.2x1.2 hole 0.9: 1(0,0)
  round 1.2 hole 0.9: 2(2.5,0) 3(5,0) 4(7.5,0) 5(10,0)
  silkscreen extent -1.43,-1.63 11.48,1.48
Kemet_10pF_0805 [mm]
  rect 1.35x1.55 smd: 1(-1,-0.025) 2(1,-0.025)
  silkscreen extent -2.08,-1.19 2.08,1.17, body extent -1.1,-0.72 1.1,0.72, height 0.88
LM2595s-3.3 [mm]
  rect 2.16x1.07 smd: 1(0,3.4) 2(0,1.7) 3(0,0) 4(0,-1.7) 5(0,-3.4)
  rect 7x10.8 smd: 6(10.67,0)
  silkscreen extent 1.78,-6.35 15.24,6.48, body extent 0,-5.21 12.13,5.21, height 4.8
LM2595s-5.0 [mm]
  rect 2.16x1.07 smd: 1(0,3.4) 2(0,1.7) 3(0,0) 4(0,-1.7) 5(0,-3.4)
  rect 7x10.8 smd: 6(10.67,0)
  silkscreen extent 1.78,-6.35 15.24,6.48, body extent 0,-5.21 12.13,5.21, height 4.8
LowR_Yageo [mm]
  rect 1x1.4 smd: 1(-1.45,-0.1) 2(0.3,-0.1)
  silkscreen extent -2.5,-1.17 1.31,1.02, body extent -1.58,-0.72 0.43,0.48, height 0.71
LT1990ACS8 [mil]
  rect 51.18x35 smd: 1(0,0)
  oval 55.12x35 smd: 2(-5,-50) 3(-5,-100) 4(-5,-150) 6(205,-100) 7(205,-50)
  silkscreen extent 60,-175 135,25, body extent -20,-174 224,24, height 69
"MMSZ5231B-7-F Zener diode" [mm]
  rect 0.9x0.95 smd: A(-1.575,0) K(1.575,0)
  silkscreen extent -2.92,-1.4 2.92,1.13, body extent -1.92,-0.67 1.92,0.67, height 0.81
Opto_Isolator_ACSL6400_50TE [mm]
  rect 2.16x0.64 smd: 1(0,0)
  oval 2.16x0.64 smd: 2(0,-1.27) 3(0,-2.54) 4(0,-3.81) 5(0,-5.08) 6(0,-6.35) 7(0,-7.62) 8(0,-8.89) 9(5.11,-8.89) 10(5.11,-7.62) 11(5.11,-6.35) 12(5.11,-5.08) 13(5.11,-3.81) 14(5.11,-2.54) 15(5.11,-1.27) 16(5.11,0)
  silkscreen extent 1.42,-9.33 3.8,0.31, body extent -0.52,-9.45 5.67,0.55, height 1.53
PIC_32_POD [mm]
  rect 1.2x1.2 hole 0.9: 1(-8.675,-0.025)
  round 1.2 hole 0.9: 2(-6.175,-0.025) 3(-3.675,-0.025) 4(-1.175,-0.025) 5(1.325,-0.025) 6(3.825,-0.025) 7(6.325,-0.025) 8(8.825,-0.025)
  silkscreen extent -10.1,-1.65 10.25,1.45
Quad64_2 [mm]
  oval 0.85x0.28 smd: 1(0,0) 2(0,-0.5) 3(0,-1) 4(0,-1.5) 5(0,-2) 6(0,-2.5) 7(0,-3) 8(0,-3.5) 9(0,-4) 10(0,-4.5) 11(0,-5) 12(0,-5.5) 13(0,-6) 14(0,-6.5) 15(0,-7) 16(0,-7.5) 33(8.9,-7.5) 34(8.9,-7) 35(8.9,-6.5) 36(8.9,-6) 37(8.9,-5.5) 38(8.9,-5) 39(8.9,-4.5) 40(8.9,-4) 41(8.9,-3.5) 42(8.9,-3) 43(8.9,-2.5) 44(8.9,-2) 45(8.9,-1.5) 46(8.9,-1) 47(8.9,-0.5) 48(8.9,0)
  oval 0.28x0.85 smd: 17(0.7,-8.2) 18(1.2,-8.2) 19(1.7,-8.2) 20(2.2,-8.2) 21(2.7,-8.2) 22(3.2,-8.2) 23(3.7,-8.2) 24(4.2,-8.2) 25(4.7,-8.2) 26(5.2,-8.2) 27(5.7,-8.2) 28(6.2,-8.2) 29(6.7,-8.2) 30(7.2,-8.2) 31(7.7,-8.2) 32(8.2,-8.2) 49(8.2,0.7) 50(7.7,0.7) 51(7.2,0.7) 52(6.7,0.7) 53(6.2,0.7) 54(5.7,0.7) 55(5.2,0.7) 56(4.7,0.7) 57(4.2,0.7) 58(3.7,0.7) 59(3.2,0.7) 60(2.7,0.7) 61(2.2,0.7) 62(1.7,0.7) 63(1.2,0.7) 64(0.7,0.7)
  silkscreen extent 0.96,-7.24 7.94,-0.26, body extent -0.05,-8.25 8.95,0.75, height 0.99
Resistor_YAGEO_0805 [mil]
  rect 39.37x55.12 smd: 1(-36,-1) 2(39,-1)
  silkscreen extent -75,-43 75,43, body extent -40,-27 43,26, height 24
VRef [mil]
  rect 27.56x23.62 smd: 1(-5,-1) 2(-5,-38) 3(-5,-76) 4(110,-76) 5(110,-1)
  silkscreen extent 18,-92 87,16, body extent -6,-97 112,21, height 57
XTAL_405C11A16M00000 [mm]
  rect 1.2x1.8 smd: 1(-1.2,2) 2(-1.2,-2) 3(1.2,-2) 4(1.2,2)
  silkscreen extent -2.65,-2.5 1.6,2.5, body extent -1.6,-2.5 1.6,2.5, height 0.85
? [mm]
  round 1.2 hole 0.7: 1(17.78,0) 2(17.78,-2.54) 3(15.24,0) 4(15.24,-2.54) 5(12.7,0) 6(12.7,-2.54) 7(10.16,0) 8(10.16,-2.54) 9(7.62,0) 10(7.62,-2.54) 11(5.08,0) 12(5.08,-2.54) 13(2.54,0) 14(2.54,-2.54) 15(0,0) 16(0,-2.54)
  silkscreen extent -5.35,-12.27 23.15,1.38, body extent -5.08,-13.23 22.83,0.33, height 8.45

## Part data
1: library part 30316-5002HB, "Conn Shrouded Header (4 Sides) HDR 16 POS 2.54mm Solder RA Side Entry Thru-Hole Box", Color=Black, Current Rating=1A, Manufacturer=3M, Max Operating Temperature=105°C, Min Operating Temperature=-55°C, Package Quantity=1000, Supplier Part Number 1=3M11930-ND, Category=Connectors, ComponentLink1Description=https://datasheet.ciiva.com/6832/ts0818-6832733.pdf?src-supplier=Digi-Key, ComponentLink1URL=https://datasheet.ciiva.com/6832/ts0818-6832733.pdf?src-supplier=Digi-Key, Connector Type="Male Pin", Contact Material=Brass, Contact Mating Length=0.236inch, Contact Plating=Gold, Contact Type="Male Pin", Depth=13.26mm, Gender=Male, Housing Color=Black, Housing Material=Polyester, Lead Free="Lead Free", Length=27.9mm, Manufacturer Part Number=30316-5002HB, Max Current Rating=1A, Mounting Technology="Through Hole", Number of Positions=16, Number of Rows=2, Orientation="Right Angle", Packaging=Bulk, Pitch=2.54mm, Pricing 1="1=1.55000, 10=1.35200, 100=1.20850, 500=1.00712, 1000=0.86325, 5000=0.76541, 10000=0.74815 (USD)", RoHS=Yes, RoHS Compliant=Yes, Row Spacing=0.1inch, Series=303, Stock 1=5922, Supplier 1=Digi-Key, Termination=Solder
ADC1 ADC2: "IC ADC 16BIT SAR 20SSOP", Case/Package=SSOP, Manufacturer="Texas Instruments", Max Operating Temperature=85°C, Max Power Dissipation=10mW, Max Supply Voltage=5.25V, Min Operating Temperature=-40°C, Min Supply Voltage=2.7V, Nominal Supply Current=1.5mA, Operating Supply Voltage=5V, Package Quantity=1000, Power Consumption=3.6mW, Power Dissipation=7.5mW, Supplier Part Number 1=296-41197-1-ND, Category="Analog to Digital Converters (ADCs)", ComponentLink1Description=https://datasheet.ciiva.com/4031/2422049s9164356n7713-4031078.pdf?src-supplier=Arrow+Electronics, ComponentLink1URL=https://datasheet.ciiva.com/4031/2422049s9164356n7713-4031078.pdf?src-supplier=Arrow+Electronics, ComponentLink2Description=https://datasheet.ciiva.com/1308/ads8344-1308384.pdf?src-supplier=Digi-Key, ComponentLink2URL=https://datasheet.ciiva.com/1308/ads8344-1308384.pdf?src-supplier=Digi-Key, Contact Plating=Gold, Conversion Rate=100KS/s, Differential Nonlinearity=2LSB, Integral Nonlinearity (INL)=6LSB, Interface=Serial, Lead Free="Lead Free", Manufacturer Part Number=ADS8344N/1K, Max Supply Voltage (DC)=5.25V, Min Supply Voltage (DC)=2.7V, Number of A/D Converters=1, Number of Bits=16, Number of Converters=1, Number of Inputs=8, Number of Pins=20, Packaging="Tape and Reel", Polarity=Unipolar, Pricing 1="1=18.10000, 10=16.63400, 25=15.94480, 100=14.04870, 250=13.35924, 500=13.00960 (USD)", REACH SVHC="No SVHC", Resolution=16b, RoHS=Yes, RoHS Compliant=Yes, Sampling Rate=100KS/s, Series=-, Spurious-free dynamic range (SFDR)=92dB, Stock 1=1147, Supplier 1=Digi-Key, Supply Current=1.5mA, Supply Type=Single
C1 C2 C12 C13 C14 C15: library part C0805C475J4RACAUTO, "CAP CER 4.7UF 16V X7R 0805", Capacitance=4.7uF, Case/Package=0805, Manufacturer=KEMET, Max Operating Temperature=125°C, Min Operating Temperature=-55°C, Ratings=AEC-Q200, Supplier Part Number 1=399-15716-1-ND, Tolerance=5%, Voltage Rating=16V, Category="Ceramic Capacitors", ComponentLink1Description=http://www.farnell.com/datasheets/2741387.pdf?src-supplier=Farnell, ComponentLink1URL=http://www.farnell.com/datasheets/2741387.pdf?src-supplier=Farnell, ComponentLink2Description=https://api.kemet.com/component-edge/download/datasheet/C0805C475J4RACAUTO.pdf?src-supplier=Digi-Key, ComponentLink2URL=https://api.kemet.com/component-edge/download/datasheet/C0805C475J4RACAUTO.pdf?src-supplier=Digi-Key, ComponentLink3Description=http://www.farnell.com/datasheets/2741387.pdf?src-supplier=Newark, ComponentLink3URL=http://www.farnell.com/datasheets/2741387.pdf?src-supplier=Newark, Manufacturer Part Number=C0805C475J4RACAUTO, Mount="Surface Mount", Packaging="Tape and Reel", Pricing 1="1=0.56000, 10=0.39300, 50=0.29680, 100=0.25850, 500=0.19150, 1000=0.16277 (USD)", RoHS=Yes, RoHS Compliant=Yes, Stock 1=16673, Supplier 1=Digi-Key
C3 C4 C10 C11 C16 C17 C85 C89 C90 C91 C92: library part C0805C104J4RACTU, "Cap Ceramic 0.1uF 16V X7R 5% SMD 0805 125°C Plastic T/R", Capacitance=100nF, Case Code (Imperial)=0805, Case Code (Metric)=2012, Dielectric=X7R, Dielectric Material=Ceramic, Manufacturer=KEMET, Max Operating Temperature=125°C, Min Operating Temperature=-55°C, Package Quantity=4000, Supplier Part Number 1=399-C0805C104J4RAC7800CT-ND, Voltage Rating=16V, Case/Package=0805, Category="Ceramic Capacitors", ComponentLink1Description=http://www.farnell.com/datasheets/2746326.pdf?src-supplier=Farnell, ComponentLink1URL=http://www.farnell.com/datasheets/2746326.pdf?src-supplier=Farnell, ComponentLink2Description=http://www.farnell.com/datasheets/2323359.pdf?src-supplier=Farnell, ComponentLink2URL=http://www.farnell.com/datasheets/2323359.pdf?src-supplier=Farnell, ComponentLink3Description=http://www.mouser.com/ds/2/212/KEM_C1002_X7R_SMD-1102033.pdf?src-supplier=Mouser, ComponentLink3URL=http://www.mouser.com/ds/2/212/KEM_C1002_X7R_SMD-1102033.pdf?src-supplier=Mouser, ComponentLink4Description=http://components.arrow.com/part/dataview/3452184S4481915N7429?src-supplier=Arrow+Electronics, ComponentLink4URL=http://components.arrow.com/part/dataview/3452184S4481915N7429?src-supplier=Arrow+Electronics, ComponentLink5Description=https://api.kemet.com/component-edge/download/datasheet/C0805C104J4RACTU.pdf?src-supplier=Digi-Key, ComponentLink5URL=https://api.kemet.com/component-edge/download/datasheet/C0805C104J4RACTU.pdf?src-supplier=Digi-Key, ComponentLink6Description=http://www.farnell.com/datasheets/2330568.pdf?src-supplier=Newark, ComponentLink6URL=http://www.farnell.com/datasheets/2330568.pdf?src-supplier=Newark, ComponentLink7Description=http://www.farnell.com/datasheets/2746326.pdf?src-supplier=Newark, ComponentLink7URL=http://www.farnell.com/datasheets/2746326.pdf?src-supplier=Newark, Depth=1.25mm, Dissipation Factor=5%, Height=0.9mm, Lead Pitch=0.75mm, Length=2mm, Manufacturer Part Number=C0805C104J4RACTU, Mount="Surface Mount", Packaging="Tape and Reel", Pricing 1="1=0.53000, 10=0.37300, 50=0.28180, 100=0.24540, 500=0.18180, 1000=0.15453 (USD)", RoHS=Yes, RoHS Compliant=Yes, Series=-, Stock 1=21669, Supplier 1=Digi-Key, Termination=SMD/SMT, Thickness=0.035inch, Voltage Rating (DC)=16V, Width=1.2mm
C5 C6 C8 C9: library part C0805C104K6RACTU, "Cap Ceramic 0.1uF 35V X7R 10% SMD 0805 125°C Paper T/R", Capacitance=100nF, Case/Package=0805, Dielectric=X7R, Dielectric Material=Ceramic, Manufacturer=KEMET, Max Operating Temperature=125°C, Min Operating Temperature=-55°C, Supplier Part Number 1=399-17618-1-ND, Tolerance=10%, Voltage Rating (DC)=35V, Category="Ceramic Capacitors", ComponentLink1Description=http://www.kemet.com/kemet/web/homepage/kechome.nsf/weben/C4DA2DA1D1C9D3C3CA2570A50016092D/$file/KEM_C1002_X7R_SMD.pdf?src-supplier=Avnet, ComponentLink1URL=http://www.kemet.com/kemet/web/homepage/kechome.nsf/weben/C4DA2DA1D1C9D3C3CA2570A50016092D/$file/KEM_C1002_X7R_SMD.pdf?src-supplier=Avnet, ComponentLink2Description=https://api.kemet.com/component-edge/download/datasheet/C0805C104K6RAC7800.pdf?src-supplier=Digi-Key, ComponentLink2URL=https://api.kemet.com/component-edge/download/datasheet/C0805C104K6RAC7800.pdf?src-supplier=Digi-Key, Construction=Flat, Depth=1.25mm, Height=0.9mm, Length=2mm, Manufacturer Part Number=C0805C104K6RACTU, Mount="Surface Mount", Packaging="Tape and Reel", Pricing 1="1=0.44000, 10=0.30300, 50=0.21200, 100=0.18180, 500=0.13636, 1000=0.11514 (USD)", Radiation Hardening=No, RoHS=Yes, RoHS Compliant=Yes, Stock 1=14662, Supplier 1=Digi-Key
C7 C19 C20 C22 C23 C24 C25 C26 C27 C28 C29 C30 C31 C32 C33 C34 C35 C36 C37 C38 C39 C40 C41 C42 C43 C44 C45 C46 C47 C48 C49 C50 C51 C52 C53 C54 C55 C56 C57 C58 C59 C60 C61 C62 C63 C64 C65 C66 C67 C68 C69 C70 C73 C75 C78 C79 C82 C84: library part ".1 uF cap"
C18 C74 C76 C83: library part "10 uF cap"
C21: library part "1uf cap"
C71 C80: library part "330 uF cap"
C72 C77 C81: library part "220 uF capacitor"
C86 C87: library part C0805C100F5GACAUTO, "Cap, AEC-Q200, 10PF, 50V, Mlcc, 0805;", Capacitance=10pF, Manufacturer=KEMET, Supplier Part Number 1=399-C0805C100F5GACAUTOCT-ND, Category="Ceramic Capacitors", Manufacturer Part Number=C0805C100F5GACAUTO, Pricing 1="1=0.74000, 10=0.54800, 50=0.43840, 100=0.37570, 500=0.29744, 1000=0.25048 (USD)", RoHS=Yes, RoHS Compliant=Yes, Stock 1=3879, Supplier 1=Digi-Key, Tollerance=1%
C88: library part C0805C106K3PACTU, "0805 C 10uF Ceramic Multilayer Capacitor; 25 VDC; +85degC; X5R Dielec; +/-10%", Capacitance=10uF, Case Code (Imperial)=0805, Case Code (Metric)=2012, Dielectric=X5R, Dielectric Material=Ceramic, Manufacturer=KEMET, Max Operating Temperature=85°C, Min Operating Temperature=-55°C, Supplier Part Number 1=399-11939-1-ND, Tolerance=10%, Voltage=25V, Case/Package=0805, Category="Ceramic Capacitors", ComponentLink1Description=http://www.farnell.com/datasheets/2741185.pdf?src-supplier=Farnell, ComponentLink1URL=http://www.farnell.com/datasheets/2741185.pdf?src-supplier=Farnell, ComponentLink2Description=http://www.alliedelec.com/m/d/f3c02ddb98afa3dd1adcb801109671e9.pdf?src-supplier=Allied+Electronics, ComponentLink2URL=http://www.alliedelec.com/m/d/f3c02ddb98afa3dd1adcb801109671e9.pdf?src-supplier=Allied+Electronics, ComponentLink3Description=https://api.kemet.com/component-edge/download/datasheet/C0805C106K3PAC7800.pdf?src-supplier=Digi-Key, ComponentLink3URL=https://api.kemet.com/component-edge/download/datasheet/C0805C106K3PAC7800.pdf?src-supplier=Digi-Key, ComponentLink4Description=http://www.kemet.com/docfinder?Partnumber=C0805C106K3PAC7800&src-supplier=Digi-Key, ComponentLink4URL=http://www.kemet.com/docfinder?Partnumber=C0805C106K3PAC7800&src-supplier=Digi-Key, ComponentLink5Description=http://www.kemet.com/Lists/ProductCatalog/Attachments/19/KEM_C1006_X5R_SMD.pdf?src-supplier=Avnet, ComponentLink5URL=http://www.kemet.com/Lists/ProductCatalog/Attachments/19/KEM_C1006_X5R_SMD.pdf?src-supplier=Avnet, ComponentLink6Description=http://www.farnell.com/datasheets/2741185.pdf?src-supplier=Newark, ComponentLink6URL=http://www.farnell.com/datasheets/2741185.pdf?src-supplier=Newark, ComponentLink7Description=http://www.farnell.com/datasheets/2741185.pdf?src-supplier=Element14, ComponentLink7URL=http://www.farnell.com/datasheets/2741185.pdf?src-supplier=Element14, Depth=1.25mm, Dissipation Factor=10%, Height=1.25mm, Lead Free="Lead Free", Length=0.079inch, Manufacturer Part Number=C0805C106K3PACTU, Mount="Surface Mount", Packaging="Cut Tape", Pricing 1="1=0.27000, 10=0.18400, 50=0.11040, 100=0.09330, 500=0.06382, 1000=0.05645 (USD)", REACH SVHC="No SVHC", RoHS=Yes, RoHS Compliant=Yes, Stock 1=269800, Supplier 1=Digi-Key, Termination=Solder, Thickness=0.057inch, Voltage Rating=25V, Voltage Rating (DC)=25V, Width=0.049inch
Crystal_1: "CRYSTAL 16.0000MHZ 10PF SMD", Package="NON STANDARD-4 CTS Components", Check_prices=https://www.snapeda.com/parts/405C11A16M00000/CTS-Frequency+Controls/view-part/?ref=eda, Digi-Key_Part_Number=CTX834TR-ND, MF="CTS-Frequency Controls", MP=405C11A16M00000, Purchase-URL=https://pricing.snapeda.com/search/part/405C11A16M00000/?ref=eda, SnapEDA_Link=https://www.snapeda.com/parts/405C11A16M00000/CTS-Frequency+Controls/view-part/?ref=snap
DC/DC1: library part LM2595SX-3.3/NOPB, "SIMPLE SWITCHE Power Converter 150 KHz 1A Step-Down Voltage egulator 5-DDPAK/TO-263", Case/Package=TO-263, Frequency=150kHz, Manufacturer="Texas Instruments", Manufacturer Part Number=LM2595S-5.0/NOPB, Max Input Voltage=40V, Max Operating Temperature=125°C, Max Output Current=1A, Max Output Voltage=5V, Min Input Voltage=4.5V, Min Operating Temperature=-40°C, Package Quantity=45, Quiescent Current=5mA, Switching Frequency=173kHz, Category="Voltage Regulators - Switching", ComponentLink1Description=https://datasheet.ciiva.com/14150/eanatsemico-schaltr-lm2595-en-14150687.pdf?src-supplier=Distrelec, ComponentLink1URL=https://datasheet.ciiva.com/14150/eanatsemico-schaltr-lm2595-en-14150687.pdf?src-supplier=Distrelec, ComponentLink2Description=https://datasheet.ciiva.com/15112/getdatasheetpartid-89913-15112836.pdf?src-supplier=Verical, ComponentLink2URL=https://datasheet.ciiva.com/15112/getdatasheetpartid-89913-15112836.pdf?src-supplier=Verical, ComponentLink3Description=https://datasheet.ciiva.com/25775/1771567-25775403.pdf?src-supplier=Farnell, ComponentLink3URL=https://datasheet.ciiva.com/25775/1771567-25775403.pdf?src-supplier=Farnell, ComponentLink4Description=https://datasheet.ciiva.com/22746/1771567-22746709.pdf?src-supplier=Element14, ComponentLink4URL=https://datasheet.ciiva.com/22746/1771567-22746709.pdf?src-supplier=Element14, ComponentLink5Description=https://datasheet.ciiva.com/3219/lm2595-3219977.pdf?src-supplier=Avnet, ComponentLink5URL=https://datasheet.ciiva.com/3219/lm2595-3219977.pdf?src-supplier=Avnet, Efficiency=82%, Height=4.57mm, Lead Free="Contains Lead", Length=10.16mm, Max Supply Voltage=40V, Min Supply Voltage=4.5V, Mount="Surface Mount", Nominal Output Voltage=5V, Number of Outputs=1, Number of Pins=5, Output Current=1A, Output Type=Fixed, Output Voltage=5V, Packaging=Rail/Tube, Radiation Hardening=No, REACH SVHC="No SVHC", RoHS=Yes, RoHS Compliant=Yes, Supplier 1=Digi-Key, Termination=SMD/SMT, Weight=0.25lb, Width=8.64mm
DC/DC2: library part LM2595S-5.0/NOPB, "SIMPLE SWITCHE Power Converter 150 KHz 1A Step-Down Voltage egulator 5-DDPAK/TO-263", Case/Package=TO-263, Frequency=150kHz, Manufacturer="Texas Instruments", Max Input Voltage=40V, Max Operating Temperature=125°C, Max Output Current=1A, Max Output Voltage=5V, Min Input Voltage=4.5V, Min Operating Temperature=-40°C, Package Quantity=45, Quiescent Current=5mA, Supplier Part Number 1=LM2595S-5.0/NOPB-ND, Switching Frequency=173kHz, Category="Voltage Regulators - Switching", ComponentLink1Description=https://datasheet.ciiva.com/14150/eanatsemico-schaltr-lm2595-en-14150687.pdf?src-supplier=Distrelec, ComponentLink1URL=https://datasheet.ciiva.com/14150/eanatsemico-schaltr-lm2595-en-14150687.pdf?src-supplier=Distrelec, ComponentLink2Description=https://datasheet.ciiva.com/15112/getdatasheetpartid-89913-15112836.pdf?src-supplier=Verical, ComponentLink2URL=https://datasheet.ciiva.com/15112/getdatasheetpartid-89913-15112836.pdf?src-supplier=Verical, ComponentLink3Description=https://datasheet.ciiva.com/25775/1771567-25775403.pdf?src-supplier=Farnell, ComponentLink3URL=https://datasheet.ciiva.com/25775/1771567-25775403.pdf?src-supplier=Farnell, ComponentLink4Description=https://datasheet.ciiva.com/22746/1771567-22746709.pdf?src-supplier=Element14, ComponentLink4URL=https://datasheet.ciiva.com/22746/1771567-22746709.pdf?src-supplier=Element14, ComponentLink5Description=https://datasheet.ciiva.com/3219/lm2595-3219977.pdf?src-supplier=Avnet, ComponentLink5URL=https://datasheet.ciiva.com/3219/lm2595-3219977.pdf?src-supplier=Avnet, Efficiency=82%, Height=4.57mm, Lead Free="Contains Lead", Length=10.16mm, Manufacturer Part Number=LM2595S-5.0/NOPB, Max Supply Voltage=40V, Min Supply Voltage=4.5V, Mount="Surface Mount", Nominal Output Voltage=5V, Number of Outputs=1, Number of Pins=5, Output Current=1A, Output Type=Fixed, Output Voltage=5V, Packaging=Rail/Tube, Radiation Hardening=No, REACH SVHC="No SVHC", RoHS=Yes, RoHS Compliant=Yes, Supplier 1=Digi-Key, Termination=SMD/SMT, Weight=0.25lb, Width=8.64mm
DIODE1 DIODE3: "Schottky Diode, DO-201, 40V, 3.00A", Average Rectified Current=3A, Capacitance=190pF, Case/Package=DO-201AD, Forward Voltage=950mV, Manufacturer=STMicroelectronics, Max Forward Surge Current (Ifsm)=80A, Max Operating Temperature=150°C, Max Repetitive Reverse Voltage (Vrrm)=40V, Max Reverse Current=2mA, Min Operating Temperature=-65°C, Package Quantity=1, Supplier Part Number 1=511-1N5822, Category="Rectifier Diodes", ComponentLink1Description=https://datasheet.ciiva.com/1177/1689683-1177129.pdf?src-supplier=Element14, ComponentLink1URL=https://datasheet.ciiva.com/1177/1689683-1177129.pdf?src-supplier=Element14, ComponentLink2Description=https://datasheet.ciiva.com/26339/168275-da-01-en-schottky-barrier-rectif-axial-1n5822-26339005.pdf?src-supplier=Conrad, ComponentLink2URL=https://datasheet.ciiva.com/26339/168275-da-01-en-schottky-barrier-rectif-axial-1n5822-26339005.pdf?src-supplier=Conrad, ComponentLink3Description=https://datasheet.ciiva.com/16303/cd00001626-16303311.pdf?src-supplier=Future+Electronics, ComponentLink3URL=https://datasheet.ciiva.com/16303/cd00001626-16303311.pdf?src-supplier=Future+Electronics, ComponentLink4Description=https://datasheet.ciiva.com/916/cd00001626-916051.pdf?src-supplier=Digi-Key, ComponentLink4URL=https://datasheet.ciiva.com/916/cd00001626-916051.pdf?src-supplier=Digi-Key, ComponentLink5Description=https://datasheet.ciiva.com/916/cd00001626-916050.pdf?src-supplier=Digi-Key, ComponentLink5URL=https://datasheet.ciiva.com/916/cd00001626-916050.pdf?src-supplier=Digi-Key, Current Rating=3A, Element Configuration=Single, Forward Current=3A, Height=5.3mm, Lead Free="Lead Free", Length=9.5mm, Manufacturer Part Number=B340AE-13, Max Reverse Leakage Current=2mA, Max Reverse Voltage (DC)=40V, Max Surge Current=80A, Mount="Through Hole", Number of Pins=2, Output Current=3A, Packaging="Tape and Reel", Peak Non-Repetitive Surge Current=80A, Polarity=Standard, Pricing 1="1=0.47000, 10=0.38600, 50=0.38600, 100=0.26300, 600=0.19700, 1000=0.19700, 1200=0.14700, 2400=0.12700, 9600=0.11900, 10000=0.11900 (USD)", Radiation Hardening=No, REACH SVHC="No SVHC", RoHS=Yes, RoHS Compliant=Yes, Series=-, Stock 1=125419, Supplier 1=Mouser, Voltage Rating (DC)=40V, Weight=0.01lb, Width=5.3mm
DIODE2: library part MMSZ5231B-7-F, "Zener diode", Average Rectified Current=3A, Capacitance=190pF, Case/Package=DO-201AD, Forward Voltage=950mV, Manufacturer=STMicroelectronics, Max Forward Surge Current (Ifsm)=80A, Max Operating Temperature=150°C, Max Repetitive Reverse Voltage (Vrrm)=40V, Max Reverse Current=2mA, Min Operating Temperature=-65°C, Package Quantity=1, Supplier Part Number 1=511-1N5822, Category="Rectifier Diodes", ComponentLink1Description=https://datasheet.ciiva.com/1177/1689683-1177129.pdf?src-supplier=Element14, ComponentLink1URL=https://datasheet.ciiva.com/1177/1689683-1177129.pdf?src-supplier=Element14, ComponentLink2Description=https://datasheet.ciiva.com/26339/168275-da-01-en-schottky-barrier-rectif-axial-1n5822-26339005.pdf?src-supplier=Conrad, ComponentLink2URL=https://datasheet.ciiva.com/26339/168275-da-01-en-schottky-barrier-rectif-axial-1n5822-26339005.pdf?src-supplier=Conrad, ComponentLink3Description=https://datasheet.ciiva.com/16303/cd00001626-16303311.pdf?src-supplier=Future+Electronics, ComponentLink3URL=https://datasheet.ciiva.com/16303/cd00001626-16303311.pdf?src-supplier=Future+Electronics, ComponentLink4Description=https://datasheet.ciiva.com/916/cd00001626-916051.pdf?src-supplier=Digi-Key, ComponentLink4URL=https://datasheet.ciiva.com/916/cd00001626-916051.pdf?src-supplier=Digi-Key, ComponentLink5Description=https://datasheet.ciiva.com/916/cd00001626-916050.pdf?src-supplier=Digi-Key, ComponentLink5URL=https://datasheet.ciiva.com/916/cd00001626-916050.pdf?src-supplier=Digi-Key, Current Rating=3A, Element Configuration=Single, Forward Current=3A, Height=5.3mm, Lead Free="Lead Free", Length=9.5mm, Manufacturer Part Number=MMSZ5231B-7-F, Max Reverse Leakage Current=2mA, Max Reverse Voltage (DC)=40V, Max Surge Current=80A, Mount="Through Hole", Number of Pins=2, Output Current=3A, Packaging="Tape and Reel", Peak Non-Repetitive Surge Current=80A, Polarity=Standard, Pricing 1="1=0.47000, 10=0.38600, 50=0.38600, 100=0.26300, 600=0.19700, 1000=0.19700, 1200=0.14700, 2400=0.12700, 9600=0.11900, 10000=0.11900 (USD)", Radiation Hardening=No, REACH SVHC="No SVHC", RoHS=Yes, RoHS Compliant=Yes, Series=-, Stock 1=125419, Supplier 1=Mouser, Voltage Rating (DC)=40V, Weight=0.01lb, Width=5.3mm
ESP32: Manufacturer_Part_Number=ESP32-WROOM-32D(M113DH6400PH3Q0), Mfr_Name="Espressif Systems", C="Copyright (C) 2018 Accelerated Designs. All rights reserved", Copyright="Copyright (C) 2023 Ultra Librarian. All rights reserved."
"Isolated DC/DC1": "Miniature, 2W Isolated Unregulated DC/DC Converters 12-SOP -40 to 85", Case/Package=SOP, Current - Output 1=400mA, Isolation Voltage=1kV, Manufacturer="Texas Instruments", Max Input Voltage=5.5V, Max Operating Temperature=85°C, Max Output Power=2W, Max Output Voltage=5.25V, Max Power Dissipation=90mW, Min Input Voltage=4.5V, Min Operating Temperature=-40°C, Min Output Voltage=4.75V, Output Voltage=5V, Package Quantity=1000, Quiescent Current=18mA, Supplier Part Number 1=296-41242-1-ND, Switching Frequency=400kHz, Category="Integrated Circuits (ICs)", ComponentLink1Description=https://datasheet.ciiva.com/2035/dcp020503-2035713.pdf?src-supplier=Digi-Key, ComponentLink1URL=https://datasheet.ciiva.com/2035/dcp020503-2035713.pdf?src-supplier=Digi-Key, Efficiency=80%, Features=OTP, Height=0.1inch, Lead Free="Lead Free", Length=0.71inch, Manufacturer Part Number=DCP020505U/1K, Max Output Current=400mA, Number of Outputs=1, Number of Pins=12, Output Current=400mA, Output Power=2W, Output Type=Fixed, Packaging="Tape and Reel", Radiation Hardening=No, RoHS=Yes, RoHS Compliant=Yes, Series=DCP02, Supplier 1=Digi-Key, Voltage - Output 1=5V, Width=0.3inch
J1: "2.0 mm Center Pin, 2.5 A, Right Angle, Through Hole, Dc Power Jack Connector", Package=None, Availability=Unavailable, MP=PJ-037A, Price=None
L1 L2: library part "100 uH inductor"
OPIS1 OPIS2: library part ACSL-6400-50TE, "OPTOISO 2.5KV 4CH OPEN COLL 16SO", Case/Package=SOIC, Forward Current=15mA, Forward Voltage=1.8V, Isolation Voltage=2.5kV, Manufacturer="Broadcom Avago", Max Operating Temperature=100°C, Max Output Current=50mA, Max Power Dissipation=40mW, Min Operating Temperature=-40°C, Output Voltage=7V, Package Quantity=1000, Power Dissipation=65mW, Reverse Breakdown Voltage=5V, Supplier Part Number 1=516-2917-1-ND, Category=Optocouplers, ComponentLink1Description=http://components.arrow.com/part/dataview/41316762S9676761N7786?src-supplier=Arrow+Electronics, ComponentLink1URL=http://components.arrow.com/part/dataview/41316762S9676761N7786?src-supplier=Arrow+Electronics, ComponentLink2Description=http://www.farnell.com/datasheets/1790955.pdf?src-supplier=Farnell, ComponentLink2URL=http://www.farnell.com/datasheets/1790955.pdf?src-supplier=Farnell, ComponentLink3Description=https://www.verical.com/server-webapp/html/getDatasheet?partID=300680&src-supplier=Verical, ComponentLink3URL=https://www.verical.com/server-webapp/html/getDatasheet?partID=300680&src-supplier=Verical, ComponentLink4Description=http://www.avagotech.com/docs/AV02-0235EN?src-supplier=Avnet, ComponentLink4URL=http://www.avagotech.com/docs/AV02-0235EN?src-supplier=Avnet, ComponentLink5Description=http://www.avagotech.com/docs/AV02-0235EN?src-supplier=Digi-Key, ComponentLink5URL=http://www.avagotech.com/docs/AV02-0235EN?src-supplier=Digi-Key, ComponentLink6Description=https://docs.broadcom.com/docs/AV02-0235EN?src-supplier=Digi-Key, ComponentLink6URL=https://docs.broadcom.com/docs/AV02-0235EN?src-supplier=Digi-Key, ComponentLink7Description=http://www.farnell.com/datasheets/1790955.pdf?src-supplier=Newark, ComponentLink7URL=http://www.farnell.com/datasheets/1790955.pdf?src-supplier=Newark, ComponentLink8Description=http://www.farnell.com/datasheets/1790955.pdf?src-supplier=Element14, ComponentLink8URL=http://www.farnell.com/datasheets/1790955.pdf?src-supplier=Element14, ComponentLink9Description=http://www.avagotech.com/search/results.jsp?src=&siteCriteria=ACSL6400&src-supplier=Mouser, ComponentLink9URL=http://www.avagotech.com/search/results.jsp?src=&siteCriteria=ACSL6400&src-supplier=Mouser, Contact Plating=Tin,Matte, Data Rate=15Mbps, Fall Time=12ns, Input Current=15mA, Input Type=DC, Lead Free="Lead Free", Manufacturer Part Number=ACSL-6400-50TE, Mount="Surface Mount", Number of Channels=4, Number of Elements=4, Number of Pins=16, Output Current=50mA, Output Current per Channel=50mA, Packaging="Tape and Reel", Pricing 1="1=10.50000, 10=7.61700, 100=6.29380, 500=5.51204 (USD)", Propagation Delay=100ns, Radiation Hardening=No, REACH SVHC="No SVHC", Rise Time=35ns, RoHS=Yes, RoHS Compliant=Yes, Series=-, Stock 1=12687, Supplier 1=Digi-Key, Supplier 2=Digi-Key, Supplier Part Number 2=311-825CRCT-ND, Turn-On Delay Time=100ns
PIC1: Manufacturer_Part_Number=PIC32MX470F512H-I/MR, Mfr_Name=Microchip, C="Copyright (C) 2018 Accelerated Designs. All rights reserved", Copyright="Copyright (C) 2023 Ultra Librarian. All rights reserved."
R1 R2 R3 R4: library part RT0805BRD07402RL, "Res Thin Film 0805 402 Ohm 0.1% 1/8W ±25ppm/°C Molded SMD Paper T/R", Case Code (Imperial)=0805, Case Code (Metric)=2012, Manufacturer=Yageo, Max Operating Temperature=125°C, Min Operating Temperature=-55°C, Power Rating=125mW, Resistance=402R, Supplier Part Number 1=YAG4897CT-ND, Temperature Coefficient=25ppm/°C, Tolerance=0.1%, Voltage Rating=150V, Case/Package=0805, Category="Chip SMD Resistors", ComponentLink1Description=https://datasheet.ciiva.com/12706/pyu-rt-1-to-0-05-rohs-l-4-12706505.pdf?src-supplier=Mouser, ComponentLink1URL=https://datasheet.ciiva.com/12706/pyu-rt-1-to-0-05-rohs-l-4-12706505.pdf?src-supplier=Mouser, Height=500um, Lead Free="Lead Free", Length=2mm, Manufacturer Part Number=RT0805BRD07402RL, Packaging="Tape and Reel", Pricing 1="1=0.38000, 10=0.27200, 100=0.10870, 1000=0.05357, 2500=0.04963 (USD)", RoHS=Yes, RoHS Compliant=Yes, Series=RT, Stock 1=13492, Supplier 1=Digi-Key, Termination=SMD/SMT, Voltage Rating (DC)=150V, Width=1.25mm
R5 R6 R7 R8 R9 R14: library part RC0805FR-071KP, "Res Thick Film 0805 1K Ohm 1% 0.125W(1/8W) ±100ppm/C Pad SMD T/R", Case Code (Imperial)=0805, Case Code (Metric)=2012, Manufacturer=Yageo, Max Operating Temperature=155°C, Max Power Dissipation=125mW, Min Operating Temperature=-55°C, Resistance=1kR, Resistor Type="Thick Film", Supplier Part Number 1=YAG1321CT-ND, Temperature Coefficient=100ppm/°C, Tolerance=1%, Case/Package=0805, Category="Chip SMD Resistors", ComponentLink1Description=http://www.yageo.com/NewPortal/yageodocoutput?fileName=/pdf/R-Chip/PYu-RC_51_RoHS_P_0.pdf&src-supplier=Digi-Key, ComponentLink1URL=http://www.yageo.com/NewPortal/yageodocoutput?fileName=/pdf/R-Chip/PYu-RC_51_RoHS_P_0.pdf&src-supplier=Digi-Key, ComponentLink2Description=http://www.yageo.com.tw/exep/pages/download/literatures/PYu-R_INT-thick_7.pdf?src-supplier=Digi-Key, ComponentLink2URL=http://www.yageo.com.tw/exep/pages/download/literatures/PYu-R_INT-thick_7.pdf?src-supplier=Digi-Key, Features="Moisture Resistant", Height=0.024inch, Length=0.079inch, Manufacturer Part Number=RC0805FR-071KP, Number of Terminations=2, Packaging="Tape and Reel", Pricing 1="1=0.10000, 10=0.06400, 100=0.02600, 1000=0.01168, 2500=0.01014 (USD)", RoHS=Yes, RoHS Compliant=Yes, Stock 1=37560, Supplier 1=Digi-Key, Width=0.049inch
R10 R12 R13: library part RC0805FR-1010KL, "RES 10K OHM 1% 1/8W 0805", Case Code (Imperial)=0805, Case Code (Metric)=2012, Manufacturer=Yageo, Max Operating Temperature=155°C, Min Operating Temperature=-55°C, Power Rating=125mW, Resistance=10kR, Resistance Tolerance=1%, Resistor Type="Thick Film", Supplier Part Number 1=13-RC0805FR-1010KLCT-ND, Temperature Coefficient=100ppm/°C, Voltage Rating=150V, Case/Package=0805, Category="Chip SMD Resistors", ComponentLink1Description=https://datasheet.ciiva.com/7983/444164-7983754.pdf?src-supplier=Element14, ComponentLink1URL=https://datasheet.ciiva.com/7983/444164-7983754.pdf?src-supplier=Element14, ComponentLink2Description=https://datasheet.ciiva.com/15190/getdatasheetpartid-496654-15190027.pdf?src-supplier=Verical, ComponentLink2URL=https://datasheet.ciiva.com/15190/getdatasheetpartid-496654-15190027.pdf?src-supplier=Verical, Construction=Rectangular, Contact Plating=Tin,Lead,Matte, Depth=1.25mm, Height=0.5mm, Length=2mm, Manufacturer Part Number=RC0805FR-1010KL, Military Standard=Not, Number of Pins=2, Packaging="Tape and Reel", Pricing 1="1=0.10000, 10=0.03700, 100=0.01510, 1000=0.00680, 2500=0.00590, 5000=0.00487 (USD)", Radiation Hardening=No, REACH SVHC="No SVHC", RoHS=Yes, RoHS Compliant=Yes, Series=RC, Stock 1=112355, Supplier 1=Digi-Key, Termination=SMD/SMT, Tolerance=1%, Voltage Rating (DC)=150V, Width=1.25mm
R11: library part RC0805FR-07825RL, "825 Ohms ±1% 0.125W, 1/8W Chip Resistor 0805 (2012 Metric) Moisture Resistant Thick Film", Case Code (Imperial)=0805, Case Code (Metric)=2012, Manufacturer=Yageo, Max Operating Temperature=155°C, Max Power Dissipation=125mW, Min Operating Temperature=-55°C, Resistance=825R, Resistor Type="Thick Film", Supplier Part Number 1=311-825CRCT-ND, Temperature Coefficient=100ppm/°C, Tolerance=1%, Voltage Rating=150V, Case/Package=0805, Category="Chip SMD Resistors", ComponentLink1Description=https://datasheet.ciiva.com/16741/rc0805-16741467.pdf?src-supplier=Future+Electronics, ComponentLink1URL=https://datasheet.ciiva.com/16741/rc0805-16741467.pdf?src-supplier=Future+Electronics, Construction=Rectangular, Contact Plating=Tin,Matte,Lead, Depth=1.25mm, Features="Moisture Resistant", Lead Free="Lead Free", Length=2mm, Manufacturer Part Number=RC0805FR-07825RL, Military Standard=Not, Number of Terminations=2, Packaging="Tape and Reel", Power Rating=125mW, Pricing 1="1=0.10000, 10=0.03700, 100=0.01510, 1000=0.00680, 2500=0.00590 (USD)", Radiation Hardening=No, RoHS=Yes, RoHS Compliant=Yes, Series=RC, Stock 1=643539, Supplier 1=Digi-Key, Technology="THICK FILM", Termination=SMD/SMT, Voltage Rating (DC)=150V, Working Voltage=150V